# Altium PCB PCB.PcbDoc (part 1 of 2)
Units mil, origin at the board's own origin, x right, y up, seen from the top; angles counter-clockwise.
Board outline 2180 x 2315 mil, 4 copper layers (Top Layer, Layer 1, power, Bottom Layer), stack 23.756 mil thick; 49 components, 44 nets, 312 pads, 189 vias.
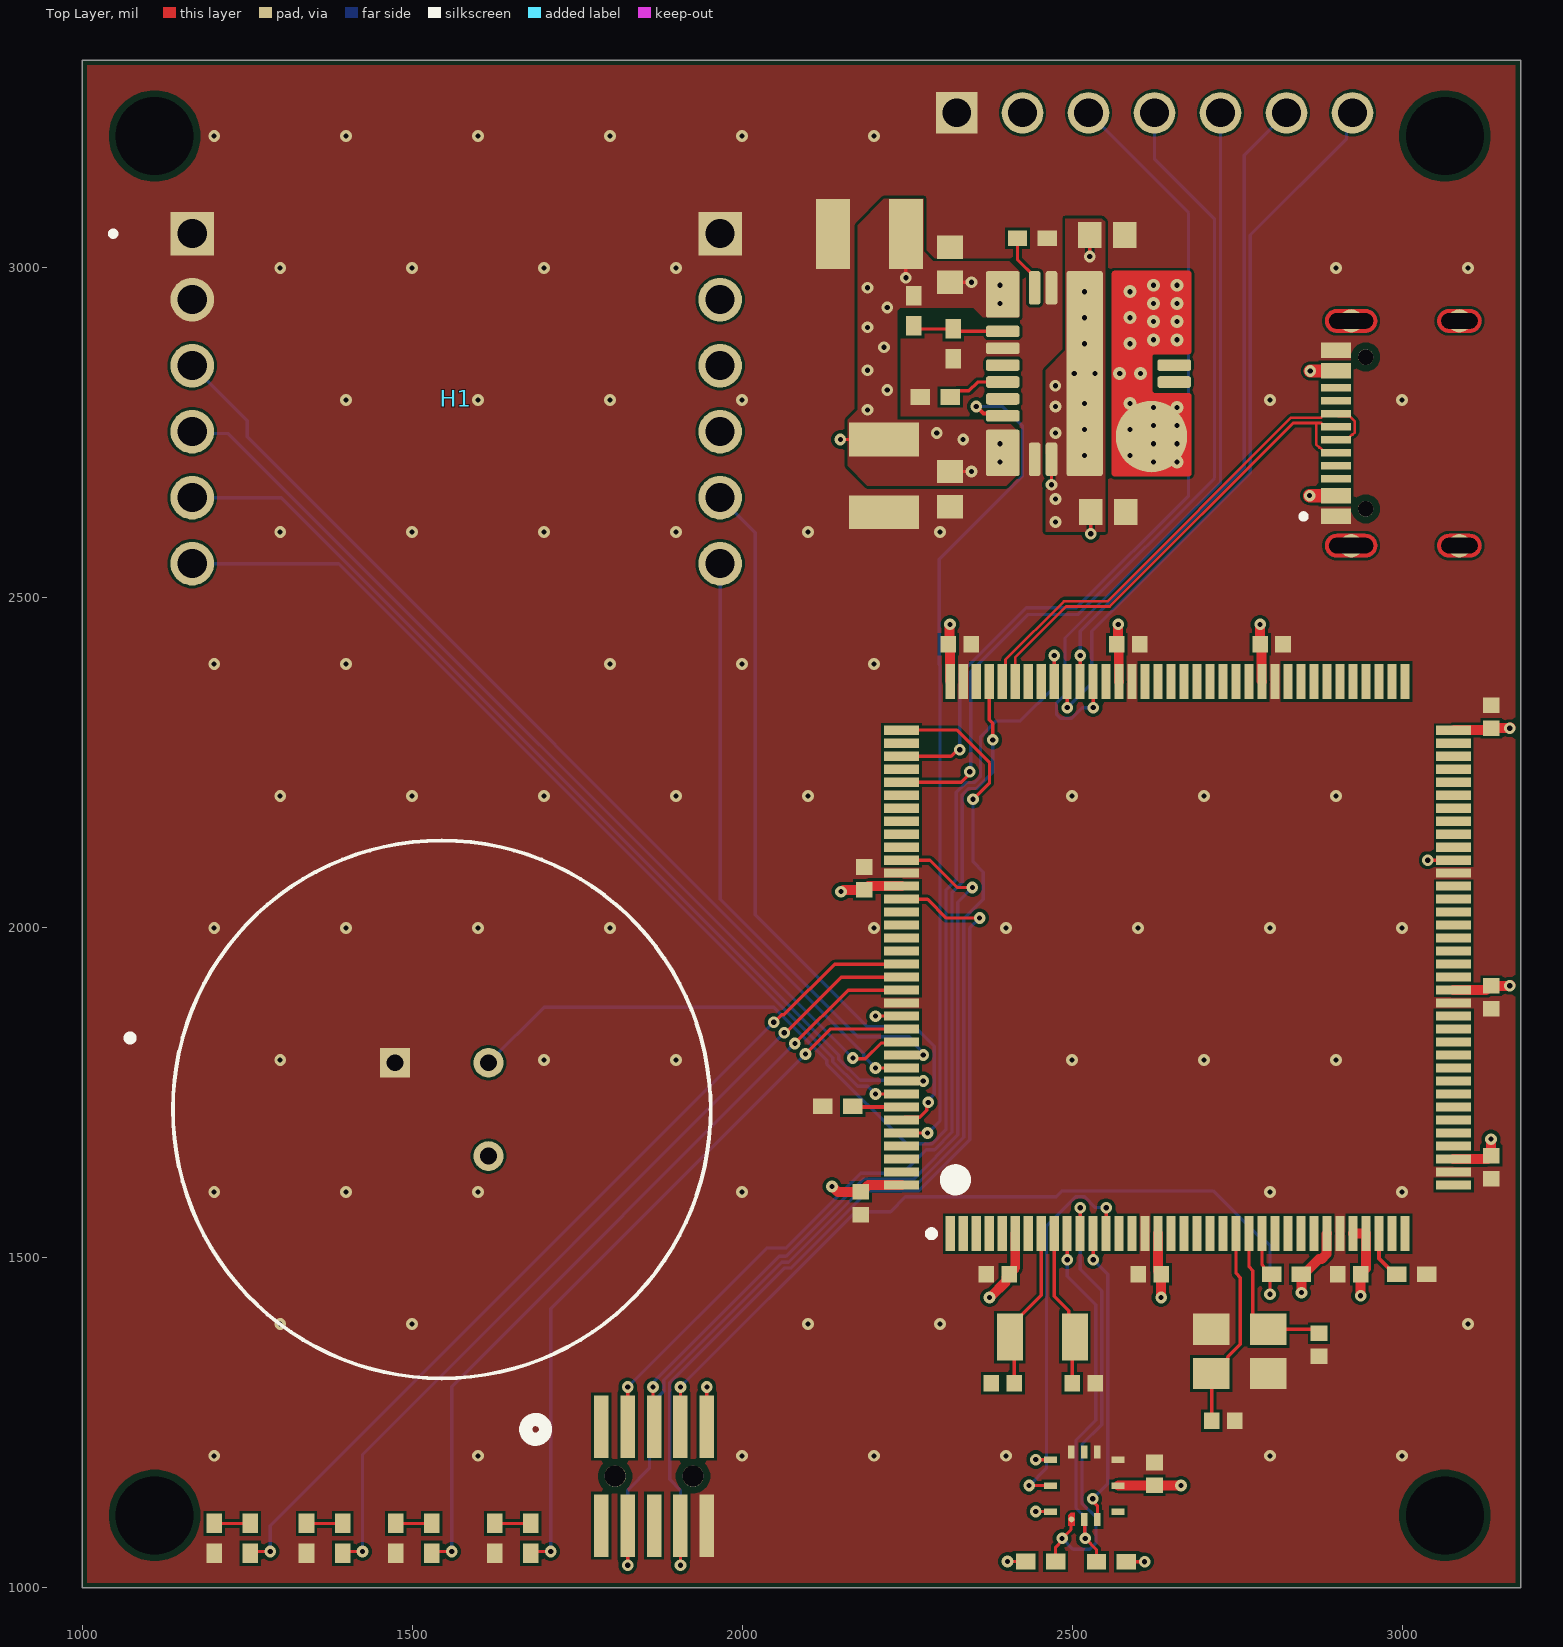
[diagram p0: Top Layer view]
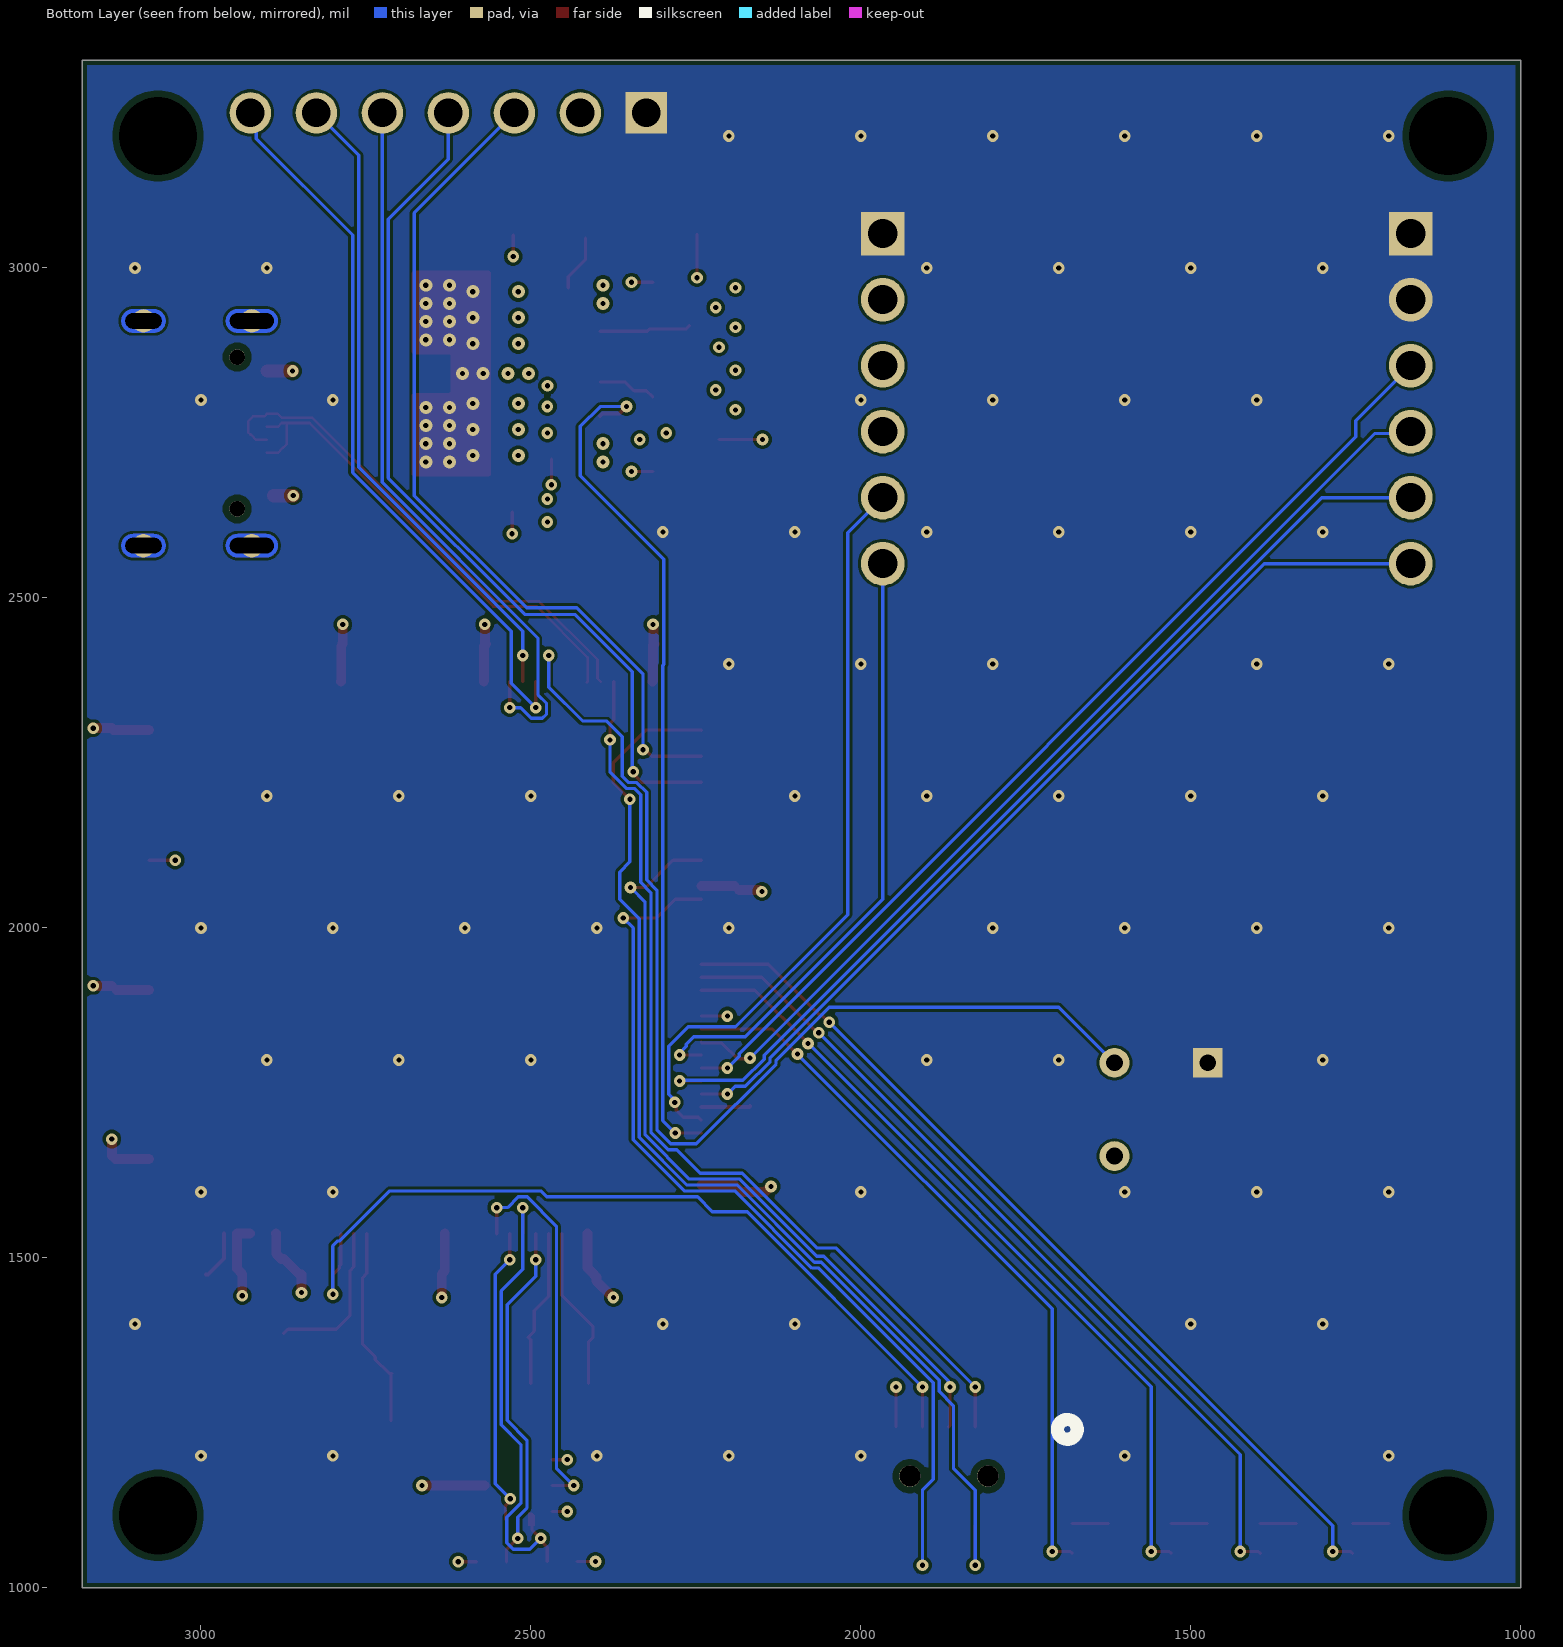
[diagram p1: Bottom Layer view, seen from below]
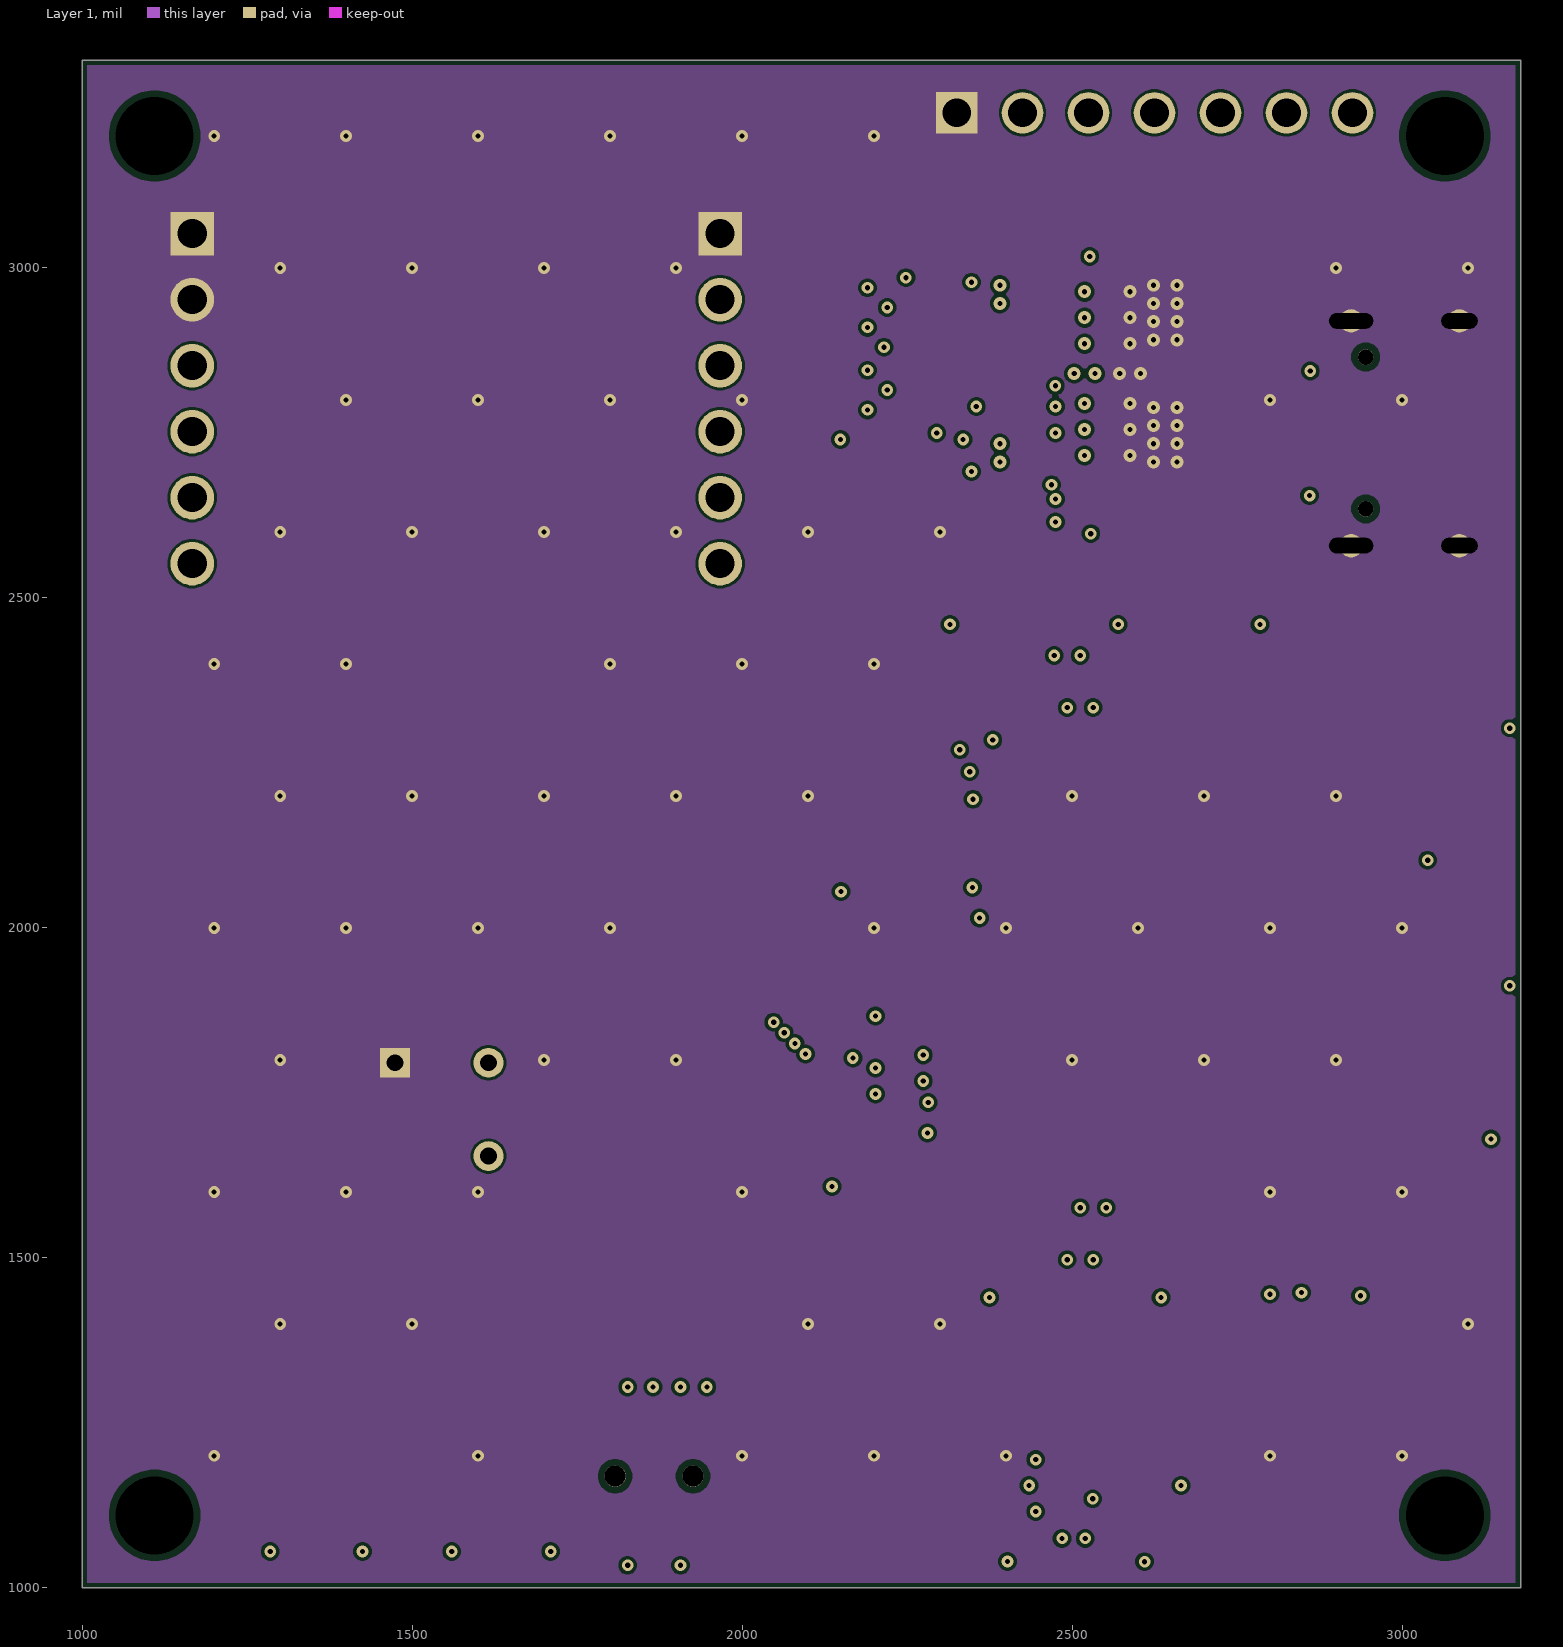
[diagram p2: Layer 1]
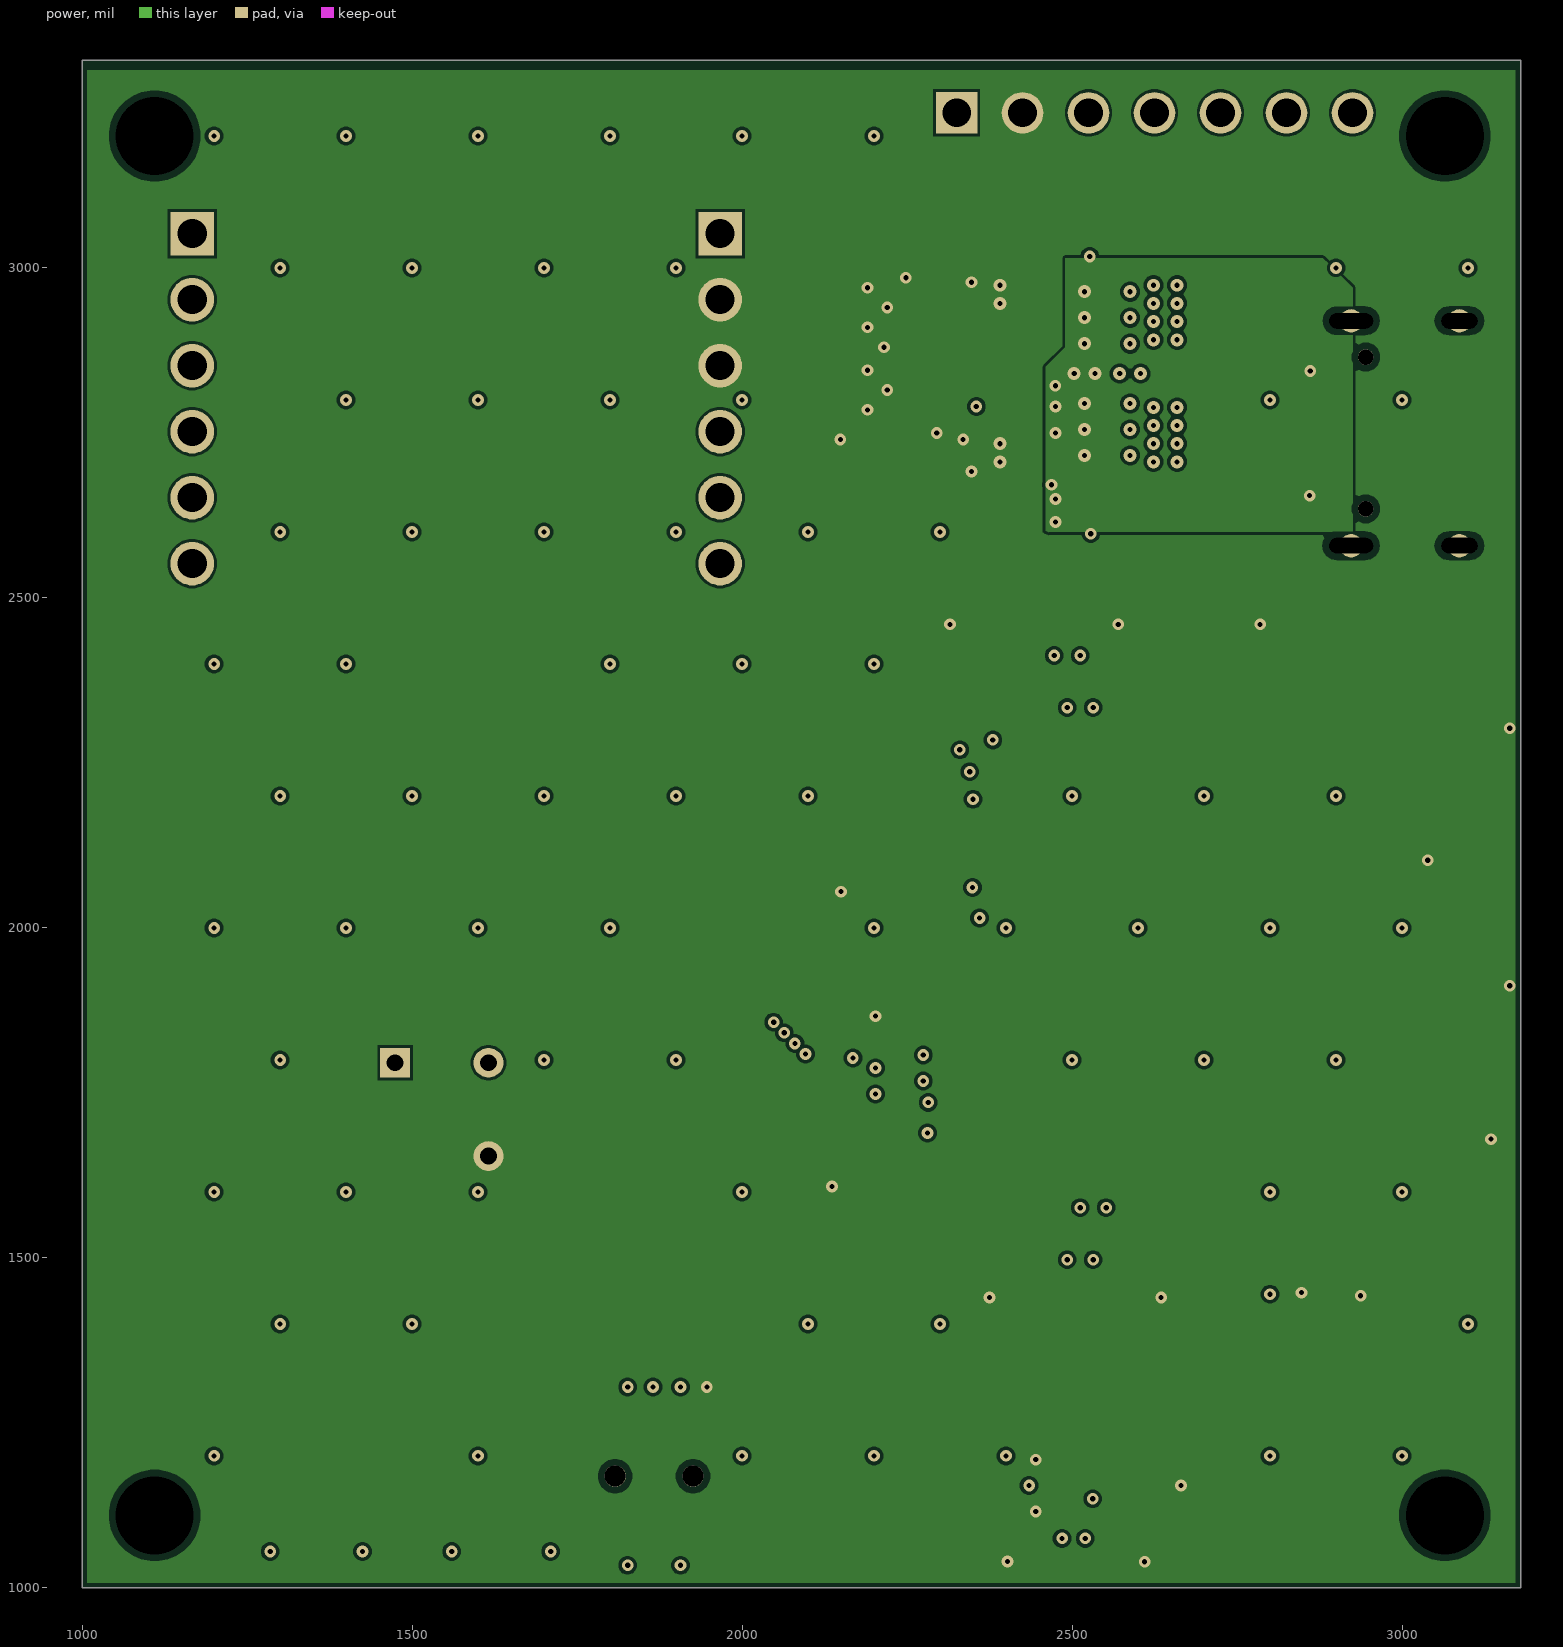
[diagram p3: power]

## Layer stack, top to bottom
Top Solder: solder mask 0.4, Solder Resist, Dk 3.5
Top Layer: signal copper 1.4
Dielectric 2: prepreg 2.8, PP-006, Dk 4.1
Layer 1: signal copper 1.378
Dielectric 1: dielectric 12.6, FR-4, Dk 4.8
power: signal copper 1.378
Dielectric 3: prepreg 2.8, PP-006, Dk 4.1
Bottom Layer: signal copper 1.4
Bottom Solder: solder mask 0.4, Solder Resist, Dk 3.5

## Board outline
1000,1000 3180,1000 3180,3315 1000,3315

## Design rules (kind name [scope] priority, off if disabled: settings)
BoardOutlineClearance [All] p1: gap=7.87 ignorepadtopadclearanceinfootprint=FALSE
Clearance [All] p1: gap=4 ignorepadtopadclearanceinfootprint=FALSE except(5: Arc-Via Track-Via SMDPad-Via THPad-Via Via-Via Via-Fill Via-Poly Via-Region Via-Text; 9.84: Arc-Hole Track-Hole SMDPad-Hole THPad-Hole Via-Hole Fill-Hole Poly-Hole Region-Hole Text-Hole)
ComponentClearance [All] p1: gap=4 collisioncheckmode=3 verticalgap=4 showdistances=TRUE
DiffPairsRouting [All] p1: maxlimit=4 minlimit=4 mostfreqgap=4 toplayer_minwidth=4 toplayer_maxwidth=71497.94 toplayer_prefwidth=4 midlayer1_minwidth=4 midlayer1_maxwidth=71497.94 midlayer1_prefwidth=4 midlayer2_minwidth=4 midlayer2_maxwidth=71497.94 midlayer2_prefwidth=4 bottomlayer_minwidth=4 bottomlayer_maxwidth=71497.94 bottomlayer_prefwidth=4 maxuncoupledlength=500
Height [All] p1: minheight=0 maxheight=71497.94 prefheight=500
HoleSize [All] p1: absolutevalues=TRUE maxlimit=248.03 minlimit=7.87 maxpercent=80.000 minpercent=20.000
HoleToHoleClearance [All] p1: gap=9.84 allowstackedmicrovias=FALSE
MinimumAnnularRing [All] p1: minimumring=3
MinimumSolderMaskSliver [All] p1: minsoldermaskwidth=0
PlaneClearance [All] p1: clearance=4
PlaneConnect PlaneConnectPowerPads [InPadClass('PowerPads')] p1: planeconnectstyle=Direct reliefexpansion=20 reliefentries=4 reliefconductorwidth=10 reliefairgap=10
PlaneConnect [All] p2: planeconnectstyle=Direct reliefexpansion=11.81 reliefentries=4 reliefconductorwidth=4 reliefairgap=4
PolygonConnect PolygonConnectPowerPads [All vs (InPadClass('PowerPads'))] p1: connectstyle=Direct reliefconductorwidth=10 reliefentries=4 polygonreliefangle="90 Angle" airgapwidth=10
PolygonConnect [All] p2: connectstyle=Direct reliefconductorwidth=4 reliefentries=4 polygonreliefangle="90 Angle" airgapwidth=4
RoutingVias [All] p1: holewidth=7.87 width=17.72 viastyle="Through Hole" minholewidth=7.87 minwidth=17.72 maxholewidth=248.03 maxwidth=257.87
SilkToSilkClearance [All] p1: silktosilkclearance=0
SilkToSolderMaskClearance [IsPad] p1: minsilkscreentomaskgap=4 clearancetoexposedcopper=TRUE
SolderMaskExpansion SolderMaskExpansion_via [IsVia] p1: expansion=2.95 istentingtop=TRUE
SolderMaskExpansion [All] p2: expansion=2.95 istentingtop=FALSE
Width [All] p1: maxlimit=71497.94 minlimit=4 preferedwidth=5
20 further rules are at their usual default settings.

## Classes and differential pairs
component class main: C1 C2 C3 C4 C5 C6 C7 C8 C9 C10 C11 C12 C13 C14 C15 C16 C17 C18 C19 C20 D2 D3 D4 H1 J1 J2 MD2 P1 R1 R2 R3 R4 R5 R6 R7 R8 R9 R10 U1 U2 Y1 Y2
differential pair USB_D: +USB_D_P -USB_D_N

## Components (designator, comment, footprint, x,y, rotation, side; value= is the part's Value field where it differs from the comment)
C1 "" "CAP 0402_1005" 2874.25,1368.34 r270 top value="9 pF"
C2 "" "CAP 0402_1005" 2387.32,1475 r180 top value="0.1 µF"
C3 "" "CAP 0402_1005" 2729.25,1253.34 r0 top value="9 pF"
C4 "" "CAP 0402_1005" 2180,1582.68 r90 top value="0.1 µF"
C5 "" "CAP 0402_1005" 2185,2075 r270 top value="0.1 µF"
C6 "" "CAP 0402_1005" 3135,1637.32 r90 top value="0.1 µF"
C7 "" "CAP 0402_1005" 2330,2430 r180 top value="0.1 µF"
C8 "" "CAP 0402_1005" 3135,2320 r270 top value="0.1 µF"
C9 "" "CAP 0402_1005" 3135,1895 r90 top value="0.1 µF"
C10 "" "CAP 0603_1608" 2555,2630 r0 top value="22 µF"
C11 "" "CAP 0603_1608" 2553.43,3050 r0 top value="22 µF"
C12 "" "CAP 0402_1005" 2395.21,1310.13 r180 top value="9 pF"
C13 "" "CAP 0402_1005" 2517.68,1310 r0 top value="9 pF"
C14 "" "CAP 0402_1005" 2802.32,2430 r180 top value="0.1 µF"
C15 "" "CAP 1210_3225 - 1MM" 2193.12,3051.34 r0 top value="47 µF"
C16 "" "CAP 0603_1608" 2315,3005 r270 top value="22 µF"
C17 "" "CAP 1210_3225 - 1MM" 2215,2685 r90 top value="47 µF"
C18 "" "CAP 0603_1608" 2315,2665 r90 top value="22 µF"
C19 "" "CAP 0402_1005" 2920,1475 r0 top value="0.1 µF"
C20 "" "CAP 0402_1005" 2617.68,1475 r0 top value="0.1 µF"
C21 "" "CAP 0402_1005" 2625,1172.68 r270 top value="0.1 µF"
C22 "" "CAP 0402_1005" 2585,2430 r180 top value="0.1 µF"
D1 "" "LED 0402_1005 BLUE" 1200,1075 r270 top value=Blue
D2 "" "LED 0402_1005 BLUE" 1340,1075 r270 top value=Blue
D3 "" "LED 0402_1005 BLUE" 1475,1075 r270 top value=Blue
D4 "" "LED 0402_1005 BLUE" 1625,1075 r270 top value=Blue
H1 "" WIZ850IO 1555,2865 r0 top
J1 "" HRO_TYPE-C-31-M-12 3087.01,2749.53 r90 top
J2 "" CONN10_M40-3200545R_HRW 1866.65,1169.31 r0 top
MD1 "" FP-EKMC1603112-MFG 1545,1725 r0 top
MD2 "" FP-MOL0024A-MFG 2525,2840 r0 top
P1 "" 61300711121 2625,3235 r0 top
R1 "" "RES 0402_1005" 3015,1475 r0 top value="10 kOhms"
R2 "" "RES 0402_1005" 2145,1730 r180 top value="10 kOhms"
R3 "" "RES 0402_1005" 2825,1475 r180 top value="10 kOhms"
R4 "" "RES 0402_1005" 2440,3045 r180 top value="48.7 kOhms"
R5 "" "RES 0402_1005" 2260,2935 r90 top value="10 kOhms"
R6 "" "RES 0402_1005" 2292.89,2804.55 r0 top value="2 kOhms"
R7 "" "RES 0402_1005" 2320,2885 r90 top value="2.21 kOhms"
R8 "" "RES 0402_1005" 2452.36,1040 r0 top value="10 kOhms"
R9 "" "RES 0402_1005" 2559.72,1039.74 r180 top value="10 kOhms"
R10 "" "RES 0402_1005" 1255,1075 r270 top value="1.5 kOhms"
R11 "" "RES 0402_1005" 1395,1075 r270 top value="1.5 kOhms"
R12 "" "RES 0402_1005" 1530,1075 r270 top value="1.5 kOhms"
R13 "" "RES 0402_1005" 1680,1075 r270 top value="1.5 kOhms"
U1 "" STM-LQFP144_V 2660,1955 r90 top
U2 "" FP-LGG12D1-MFG 2518.82,1155 r0 top
Y1 "" FP-7M-MFG 2754.25,1358.34 r180 top
Y2 "" FP-ABS07-120-MFG 2455,1380 r0 top

## Footprints (in the part's own frame and the unit in brackets; to place one, negate y for a bottom-side part, rotate by r counter-clockwise, add the part's x,y. Pads: shape width x height; smd on the part's side, far side on the other; paste and mask are expansions set on the pad)
61300711121 [mm] "Pin Header, pitch 2.54 mm, THT, Vertical, single row, 7p"
  rect 1.6x1.6 hole 1.1: 1(-7.62,0)
  round 1.6 hole 1.1: 2(-5.08,0) 3(-2.54,0) 4(0,0) 5(2.54,0) 6(5.08,0) 7(7.62,0)
  body extent -8.89,-1.27 8.89,1.27, height 8.57
"CAP 0402_1005" [mm] "Chip Capacitor, 2-Leads, Body 1.02x0.51mm, IPC Medium Density"
  rect 0.6x0.64 smd: 1(-0.44,0) 2(0.44,0)
  body extent -0.5,-0.26 0.5,0.26, height 0.52
"CAP 0603_1608" [mm] "Chip Capacitor, 2-Leads, Body 1.60x0.80mm, IPC Medium Density"
  rect 0.9x1 smd: 1(-0.675,0) 2(0.675,0)
  body extent -0.8,-0.41 0.8,0.41, height 0.82
"CAP 1210_3225 - 1MM" [mm] "Chip Capacitor, 2-Leads, Body 3.20x2.50mm, IPC Medium Density"
  rect 1.3x2.7 smd: 1(-1.4,0) 2(1.4,0)
  body extent -1.6,-1.25 1.6,1.25, height 1
CONN10_M40-3200545R_HRW [mm]
  rect 0.56x2.4 smd paste+0 mask+0: 1(-2.032,1.905) 2(-1.016,1.905) 3(0,1.905) 4(1.016,1.905) 5(2.032,1.905) 6(-2.032,-1.905) 7(-1.016,-1.905) 8(0,-1.905) 9(1.016,-1.905) 10(2.032,-1.905)
  round 0.813 hole 0.813 unplated: 11(-1.5,0) 12(1.5,0)
  silkscreen extent -4.94,1.42 -4.18,2.18, body extent 0,0 0.25,0.25, height 0.25
FP-7M-MFG [mm]
  rect 1.4x1.2 smd paste+0 mask+0: 1(-1.1,-0.85) 2(1.1,-0.85) 3(1.1,0.85) 4(-1.1,0.85)
  body extent -1.9,-1.55 1.9,1.55, height 0.25
FP-ABS07-120-MFG [mm]
  rect 1x1.8 smd paste+0 mask+0: 1(-1.25,0) 2(1.25,0)
  body extent -1.85,-1 1.85,1, height 0.25
FP-EKMC1603112-MFG [mm]
  rect 1.15x1.15 hole 0.65 paste-1000 mask+0: 1(-1.796,1.796)
  round 1.15 hole 0.65 paste-1000 mask+0: 2(1.796,1.796) 3(1.796,-1.796)
  silkscreen extent -12.12,-10.35 10.35,10.35, body extent -11.1,-10.45 11.1,10.45, height 0.25
FP-LGG12D1-MFG [mm]
  round 0.225 smd paste+0 mask+0: 1(-0.5,-1.3)
  rect 0.25x0.5 smd paste+0 mask+0: 2(0,-1.3) 3(0.5,-1.3) 7(0.5,1.3) 8(0,1.3) 9(-0.5,1.3)
  rect 0.5x0.25 smd paste+0 mask+0: 4(1.3,-1) 5(1.3,0) 6(1.3,1) 10(-1.3,1) 11(-1.3,0) 12(-1.3,-1)
  Top Layer region: -0.625,-1.55 -0.625,-1.15 -0.525,-1.05 -0.375,-1.05 -0.375,-1.55 -0.625,-1.55
  body extent -2.05,-2.05 2.05,2.05, height 0.25
FP-MOL0024A-MFG [mm]
  rrect15% 1.3x1.8 smd paste-1000 mask-1000: 1(-3.3,3.05) 8(-3.3,-3.05)
  rrect44% 1.3x0.45 smd paste-1000 mask-1000: 2(-3.3,1.625) 3(-3.3,0.975) 4(-3.3,0.325) 5(-3.3,-0.325) 6(-3.3,-0.975) 7(-3.3,-1.625) 16(3.3,-0.325) 17(3.3,0.325)
  rrect44% 0.45x1.3 smd paste-1000 mask-1000: 9(-2.075,-3.3) 10(-1.425,-3.3) 23(-1.425,3.3) 24(-2.075,3.3)
  rrect14% 1.4x7.9 smd paste-1000 mask-1000: 11-22(-0.15,0)
  round 2.745 smd paste-1000 mask-1000: 12-13-14-15-18-19-20-21(2.425,-2.425)
  Top Layer region: 0.9,3.85 0.908,3.888 0.929,3.921 0.962,3.942 1,3.95 1,3.95 3.85,3.95 3.9,3.937 3.937,3.9 3.95,3.85 3.95,3.85 3.95,0.85 3.942,0.812 3.921,0.779 3.888,0.758 3.85,0.75 3.85,0.75 2.55,0.75 2.5,0.737 2.463,0.7 2.45,0.65 2.45,0.65 2.45,-0.65 2.463,-0.7 2.5,-0.737 2.55,-0.75 2.55,-0.75 3.85,-0.75 3.9,-0.763 3.937,-0.8 3.95,-0.85 3.95,-0.85 3.95,-3.85 3.937,-3.9 3.9,-3.937 3.85,-3.95 3.85,-3.95 1,-3.95 0.95,-3.937 0.913,-3.9 0.9,-3.85 0.9,-3.85
  body extent -4.05,-4.05 4.05,4.05, height 0.25
HRO_TYPE-C-31-M-12 [mm]
  round 0.9 hole 0.6 slot 1.7 at 90 deg mask+0: 321(-4.325,4.17) S2(4.325,4.17)
  rect 0.6x1.14 smd mask+0.05: A1/B12(-3.2,4.75) A4/B9(-2.4,4.75) B1/A12(3.2,4.75) B4/A9(2.4,4.75)
  rect 0.3x1.14 smd mask+0.05: A5(-1.25,4.75) A6(-0.25,4.75) A7(0.25,4.75) A8(1.25,4.75) B5(1.75,4.75) B6(0.75,4.75) B7(-0.75,4.75) B8(-1.75,4.75)
  round 0.9 hole 0.6 slot 1.4 at 90 deg mask+0: S3(-4.325,0) S4(4.325,0)
  round 0.6 hole 0.6 unplated: ""(-2.909,3.607) ""(2.933,3.607)
  Top Layer region: -4.301,5.169 -4.278,5.168 -4.255,5.164 -4.231,5.16 -4.209,5.155 -4.186,5.148 -4.164,5.14 -4.142,5.131 -4.121,5.121 -4.1,5.11 -4.08,5.097 -4.06,5.084 -4.042,5.07 -4.024,5.054 -4.007,5.038 -3.991,5.021 -3.975,5.003 -3.961,4.985 -3.948,4.965 -3.935,4.945 -3.924,4.924 -3.914,4.903 -3.905,4.881 -3.897,4.859 -3.89,4.836 -3.885,4.814 -3.881,4.79 -3.877,4.767 -3.876,4.744 -3.875,4.72 -3.875,3.62 -3.876,3.596 -3.877,3.573 -3.881,3.55 -3.885,3.526 -3.89,3.504 -3.897,3.481 -3.905,3.459 -3.914,3.437 -3.924,3.416 -3.935,3.395 -3.948,3.375 -3.961,3.355 -3.975,3.337 -3.991,3.319 -4.007,3.302 -4.024,3.286 -4.042,3.27 -4.06,3.256 -4.08,3.243 -4.1,3.23 -4.121,3.219 -4.142,3.209 -4.164,3.2 -4.186,3.192 -4.209,3.185 -4.231,3.18 -4.255,3.176 -4.278,3.172 -4.301,3.171 -4.325,3.17 -4.349,3.171 -4.372,3.172 -4.395,3.176 -4.419,3.18 -4.441,3.185 -4.464,3.192 -4.486,3.2 -4.508,3.209 -4.529,3.219 -4.55,3.23 -4.57,3.243 -4.59,3.256 -4.608,3.27 -4.626,3.286 -4.643,3.302 -4.659,3.319 -4.675,3.337 -4.689,3.355 -4.702,3.375 -4.715,3.395 -4.726,3.416 -4.736,3.437 -4.745,3.459 -4.753,3.481 -4.76,3.504 -4.765,3.526 -4.769,3.55 -4.773,3.573 -4.774,3.596 -4.775,3.62 -4.775,4.72 -4.774,4.744 -4.773,4.767 -4.769,4.79 -4.765,4.814 -4.76,4.836 -4.753,4.859 -4.745,4.881 -4.736,4.903 -4.726,4.924 -4.715,4.945 -4.702,4.965 -4.689,4.985 -4.675,5.003 -4.659,5.021 -4.643,5.038 -4.626,5.054 -4.608,5.07 -4.59,5.084 -4.57,5.097 -4.55,5.11 -4.529,5.121 -4.508,5.131 -4.486,5.14 -4.464,5.148 -4.441,5.155 -4.419,5.16 -4.395,5.164 -4.372,5.168 -4.349,5.169 -4.325,5.17
  Top Layer region: 4.349,5.169 4.372,5.168 4.395,5.164 4.419,5.16 4.441,5.155 4.464,5.148 4.486,5.14 4.508,5.131 4.529,5.121 4.55,5.11 4.57,5.097 4.59,5.084 4.608,5.07 4.626,5.054 4.643,5.038 4.659,5.021 4.675,5.003 4.689,4.985 4.702,4.965 4.715,4.945 4.726,4.924 4.736,4.903 4.745,4.881 4.753,4.859 4.76,4.836 4.765,4.814 4.769,4.79 4.773,4.767 4.774,4.744 4.775,4.72 4.775,3.62 4.774,3.596 4.773,3.573 4.769,3.55 4.765,3.526 4.76,3.504 4.753,3.481 4.745,3.459 4.736,3.437 4.726,3.416 4.715,3.395 4.702,3.375 4.689,3.355 4.675,3.337 4.659,3.319 4.643,3.302 4.626,3.286 4.608,3.27 4.59,3.256 4.57,3.243 4.55,3.23 4.529,3.219 4.508,3.209 4.486,3.2 4.464,3.192 4.441,3.185 4.419,3.18 4.395,3.176 4.372,3.172 4.349,3.171 4.325,3.17 4.301,3.171 4.278,3.172 4.255,3.176 4.231,3.18 4.209,3.185 4.186,3.192 4.164,3.2 4.142,3.209 4.121,3.219 4.1,3.23 4.08,3.243 4.06,3.256 4.042,3.27 4.024,3.286 4.007,3.302 3.991,3.319 3.975,3.337 3.961,3.355 3.948,3.375 3.935,3.395 3.924,3.416 3.914,3.437 3.905,3.459 3.897,3.481 3.89,3.504 3.885,3.526 3.881,3.55 3.877,3.573 3.876,3.596 3.875,3.62 3.875,4.72 3.876,4.744 3.877,4.767 3.881,4.79 3.885,4.814 3.89,4.836 3.897,4.859 3.905,4.881 3.914,4.903 3.924,4.924 3.935,4.945 3.948,4.965 3.961,4.985 3.975,5.003 3.991,5.021 4.007,5.038 4.024,5.054 4.042,5.07 4.06,5.084 4.08,5.097 4.1,5.11 4.121,5.121 4.142,5.131 4.164,5.14 4.186,5.148 4.209,5.155 4.231,5.16 4.255,5.164 4.278,5.168 4.301,5.169 4.325,5.17
  Top Layer region: -4.301,0.849 -4.278,0.848 -4.255,0.844 -4.231,0.84 -4.209,0.835 -4.186,0.828 -4.164,0.82 -4.142,0.811 -4.121,0.801 -4.1,0.79 -4.08,0.777 -4.06,0.764 -4.042,0.75 -4.024,0.734 -4.007,0.718 -3.991,0.701 -3.975,0.683 -3.961,0.665 -3.948,0.645 -3.935,0.625 -3.924,0.604 -3.914,0.583 -3.905,0.561 -3.897,0.539 -3.89,0.516 -3.885,0.494 -3.881,0.47 -3.877,0.447 -3.876,0.424 -3.875,0.4 -3.875,-0.4 -3.876,-0.424 -3.877,-0.447 -3.881,-0.47 -3.885,-0.494 -3.89,-0.516 -3.897,-0.539 -3.905,-0.561 -3.914,-0.583 -3.924,-0.604 -3.935,-0.625 -3.948,-0.645 -3.961,-0.665 -3.975,-0.683 -3.991,-0.701 -4.007,-0.718 -4.024,-0.734 -4.042,-0.75 -4.06,-0.764 -4.08,-0.777 -4.1,-0.79 -4.121,-0.801 -4.142,-0.811 -4.164,-0.82 -4.186,-0.828 -4.209,-0.835 -4.231,-0.84 -4.255,-0.844 -4.278,-0.848 -4.301,-0.849 -4.325,-0.85 -4.349,-0.849 -4.372,-0.848 -4.395,-0.844 -4.419,-0.84 -4.441,-0.835 -4.464,-0.828 -4.486,-0.82 -4.508,-0.811 -4.529,-0.801 -4.55,-0.79 -4.57,-0.777 -4.59,-0.764 -4.608,-0.75 -4.626,-0.734 -4.643,-0.718 -4.659,-0.701 -4.675,-0.683 -4.689,-0.665 -4.702,-0.645 -4.715,-0.625 -4.726,-0.604 -4.736,-0.583 -4.745,-0.561 -4.753,-0.539 -4.76,-0.516 -4.765,-0.494 -4.769,-0.47 -4.773,-0.447 -4.774,-0.424 -4.775,-0.4 -4.775,0.4 -4.774,0.424 -4.773,0.447 -4.769,0.47 -4.765,0.494 -4.76,0.516 -4.753,0.539 -4.745,0.561 -4.736,0.583 -4.726,0.604 -4.715,0.625 -4.702,0.645 -4.689,0.665 -4.675,0.683 -4.659,0.701 -4.643,0.718 -4.626,0.734 -4.608,0.75 -4.59,0.764 -4.57,0.777 -4.55,0.79 -4.529,0.801 -4.508,0.811 -4.486,0.82 -4.464,0.828 -4.441,0.835 -4.419,0.84 -4.395,0.844 -4.372,0.848 -4.349,0.849 -4.325,0.85
  Top Layer region: 4.349,0.849 4.372,0.848 4.395,0.844 4.419,0.84 4.441,0.835 4.464,0.828 4.486,0.82 4.508,0.811 4.529,0.801 4.55,0.79 4.57,0.777 4.59,0.764 4.608,0.75 4.626,0.734 4.643,0.718 4.659,0.701 4.675,0.683 4.689,0.665 4.702,0.645 4.715,0.625 4.726,0.604 4.736,0.583 4.745,0.561 4.753,0.539 4.76,0.516 4.765,0.494 4.769,0.47 4.773,0.447 4.774,0.424 4.775,0.4 4.775,-0.4 4.774,-0.424 4.773,-0.447 4.769,-0.47 4.765,-0.494 4.76,-0.516 4.753,-0.539 4.745,-0.561 4.736,-0.583 4.726,-0.604 4.715,-0.625 4.702,-0.645 4.689,-0.665 4.675,-0.683 4.659,-0.701 4.643,-0.718 4.626,-0.734 4.608,-0.75 4.59,-0.764 4.57,-0.777 4.55,-0.79 4.529,-0.801 4.508,-0.811 4.486,-0.82 4.464,-0.828 4.441,-0.835 4.419,-0.84 4.395,-0.844 4.372,-0.848 4.349,-0.849 4.325,-0.85 4.301,-0.849 4.278,-0.848 4.255,-0.844 4.231,-0.84 4.209,-0.835 4.186,-0.828 4.164,-0.82 4.142,-0.811 4.121,-0.801 4.1,-0.79 4.08,-0.777 4.06,-0.764 4.042,-0.75 4.024,-0.734 4.007,-0.718 3.991,-0.701 3.975,-0.683 3.961,-0.665 3.948,-0.645 3.935,-0.625 3.924,-0.604 3.914,-0.583 3.905,-0.561 3.897,-0.539 3.89,-0.516 3.885,-0.494 3.881,-0.47 3.877,-0.447 3.876,-0.424 3.875,-0.4 3.875,0.4 3.876,0.424 3.877,0.447 3.881,0.47 3.885,0.494 3.89,0.516 3.897,0.539 3.905,0.561 3.914,0.583 3.924,0.604 3.935,0.625 3.948,0.645 3.961,0.665 3.975,0.683 3.991,0.701 4.007,0.718 4.024,0.734 4.042,0.75 4.06,0.764 4.08,0.777 4.1,0.79 4.121,0.801 4.142,0.811 4.164,0.82 4.186,0.828 4.209,0.835 4.231,0.84 4.255,0.844 4.278,0.848 4.301,0.849 4.325,0.85
  Bottom Layer region: -4.301,5.169 -4.278,5.168 -4.255,5.164 -4.231,5.16 -4.209,5.155 -4.186,5.148 -4.164,5.14 -4.142,5.131 -4.121,5.121 -4.1,5.11 -4.08,5.097 -4.06,5.084 -4.042,5.07 -4.024,5.054 -4.007,5.038 -3.991,5.021 -3.975,5.003 -3.961,4.985 -3.948,4.965 -3.935,4.945 -3.924,4.924 -3.914,4.903 -3.905,4.881 -3.897,4.859 -3.89,4.836 -3.885,4.814 -3.881,4.79 -3.877,4.767 -3.876,4.744 -3.875,4.72 -3.875,3.62 -3.876,3.596 -3.877,3.573 -3.881,3.55 -3.885,3.526 -3.89,3.504 -3.897,3.481 -3.905,3.459 -3.914,3.437 -3.924,3.416 -3.935,3.395 -3.948,3.375 -3.961,3.355 -3.975,3.337 -3.991,3.319 -4.007,3.302 -4.024,3.286 -4.042,3.27 -4.06,3.256 -4.08,3.243 -4.1,3.23 -4.121,3.219 -4.142,3.209 -4.164,3.2 -4.186,3.192 -4.209,3.185 -4.231,3.18 -4.255,3.176 -4.278,3.172 -4.301,3.171 -4.325,3.17 -4.349,3.171 -4.372,3.172 -4.395,3.176 -4.419,3.18 -4.441,3.185 -4.464,3.192 -4.486,3.2 -4.508,3.209 -4.529,3.219 -4.55,3.23 -4.57,3.243 -4.59,3.256 -4.608,3.27 -4.626,3.286 -4.643,3.302 -4.659,3.319 -4.675,3.337 -4.689,3.355 -4.702,3.375 -4.715,3.395 -4.726,3.416 -4.736,3.437 -4.745,3.459 -4.753,3.481 -4.76,3.504 -4.765,3.526 -4.769,3.55 -4.773,3.573 -4.774,3.596 -4.775,3.62 -4.775,4.72 -4.774,4.744 -4.773,4.767 -4.769,4.79 -4.765,4.814 -4.76,4.836 -4.753,4.859 -4.745,4.881 -4.736,4.903 -4.726,4.924 -4.715,4.945 -4.702,4.965 -4.689,4.985 -4.675,5.003 -4.659,5.021 -4.643,5.038 -4.626,5.054 -4.608,5.07 -4.59,5.084 -4.57,5.097 -4.55,5.11 -4.529,5.121 -4.508,5.131 -4.486,5.14 -4.464,5.148 -4.441,5.155 -4.419,5.16 -4.395,5.164 -4.372,5.168 -4.349,5.169 -4.325,5.17
  Bottom Layer region: 4.349,5.169 4.372,5.168 4.395,5.164 4.419,5.16 4.441,5.155 4.464,5.148 4.486,5.14 4.508,5.131 4.529,5.121 4.55,5.11 4.57,5.097 4.59,5.084 4.608,5.07 4.626,5.054 4.643,5.038 4.659,5.021 4.675,5.003 4.689,4.985 4.702,4.965 4.715,4.945 4.726,4.924 4.736,4.903 4.745,4.881 4.753,4.859 4.76,4.836 4.765,4.814 4.769,4.79 4.773,4.767 4.774,4.744 4.775,4.72 4.775,3.62 4.774,3.596 4.773,3.573 4.769,3.55 4.765,3.526 4.76,3.504 4.753,3.481 4.745,3.459 4.736,3.437 4.726,3.416 4.715,3.395 4.702,3.375 4.689,3.355 4.675,3.337 4.659,3.319 4.643,3.302 4.626,3.286 4.608,3.27 4.59,3.256 4.57,3.243 4.55,3.23 4.529,3.219 4.508,3.209 4.486,3.2 4.464,3.192 4.441,3.185 4.419,3.18 4.395,3.176 4.372,3.172 4.349,3.171 4.325,3.17 4.301,3.171 4.278,3.172 4.255,3.176 4.231,3.18 4.209,3.185 4.186,3.192 4.164,3.2 4.142,3.209 4.121,3.219 4.1,3.23 4.08,3.243 4.06,3.256 4.042,3.27 4.024,3.286 4.007,3.302 3.991,3.319 3.975,3.337 3.961,3.355 3.948,3.375 3.935,3.395 3.924,3.416 3.914,3.437 3.905,3.459 3.897,3.481 3.89,3.504 3.885,3.526 3.881,3.55 3.877,3.573 3.876,3.596 3.875,3.62 3.875,4.72 3.876,4.744 3.877,4.767 3.881,4.79 3.885,4.814 3.89,4.836 3.897,4.859 3.905,4.881 3.914,4.903 3.924,4.924 3.935,4.945 3.948,4.965 3.961,4.985 3.975,5.003 3.991,5.021 4.007,5.038 4.024,5.054 4.042,5.07 4.06,5.084 4.08,5.097 4.1,5.11 4.121,5.121 4.142,5.131 4.164,5.14 4.186,5.148 4.209,5.155 4.231,5.16 4.255,5.164 4.278,5.168 4.301,5.169 4.325,5.17
  Bottom Layer region: -4.301,0.849 -4.278,0.848 -4.255,0.844 -4.231,0.84 -4.209,0.835 -4.186,0.828 -4.164,0.82 -4.142,0.811 -4.121,0.801 -4.1,0.79 -4.08,0.777 -4.06,0.764 -4.042,0.75 -4.024,0.734 -4.007,0.718 -3.991,0.701 -3.975,0.683 -3.961,0.665 -3.948,0.645 -3.935,0.625 -3.924,0.604 -3.914,0.583 -3.905,0.561 -3.897,0.539 -3.89,0.516 -3.885,0.494 -3.881,0.47 -3.877,0.447 -3.876,0.424 -3.875,0.4 -3.875,-0.4 -3.876,-0.424 -3.877,-0.447 -3.881,-0.47 -3.885,-0.494 -3.89,-0.516 -3.897,-0.539 -3.905,-0.561 -3.914,-0.583 -3.924,-0.604 -3.935,-0.625 -3.948,-0.645 -3.961,-0.665 -3.975,-0.683 -3.991,-0.701 -4.007,-0.718 -4.024,-0.734 -4.042,-0.75 -4.06,-0.764 -4.08,-0.777 -4.1,-0.79 -4.121,-0.801 -4.142,-0.811 -4.164,-0.82 -4.186,-0.828 -4.209,-0.835 -4.231,-0.84 -4.255,-0.844 -4.278,-0.848 -4.301,-0.849 -4.325,-0.85 -4.349,-0.849 -4.372,-0.848 -4.395,-0.844 -4.419,-0.84 -4.441,-0.835 -4.464,-0.828 -4.486,-0.82 -4.508,-0.811 -4.529,-0.801 -4.55,-0.79 -4.57,-0.777 -4.59,-0.764 -4.608,-0.75 -4.626,-0.734 -4.643,-0.718 -4.659,-0.701 -4.675,-0.683 -4.689,-0.665 -4.702,-0.645 -4.715,-0.625 -4.726,-0.604 -4.736,-0.583 -4.745,-0.561 -4.753,-0.539 -4.76,-0.516 -4.765,-0.494 -4.769,-0.47 -4.773,-0.447 -4.774,-0.424 -4.775,-0.4 -4.775,0.4 -4.774,0.424 -4.773,0.447 -4.769,0.47 -4.765,0.494 -4.76,0.516 -4.753,0.539 -4.745,0.561 -4.736,0.583 -4.726,0.604 -4.715,0.625 -4.702,0.645 -4.689,0.665 -4.675,0.683 -4.659,0.701 -4.643,0.718 -4.626,0.734 -4.608,0.75 -4.59,0.764 -4.57,0.777 -4.55,0.79 -4.529,0.801 -4.508,0.811 -4.486,0.82 -4.464,0.828 -4.441,0.835 -4.419,0.84 -4.395,0.844 -4.372,0.848 -4.349,0.849 -4.325,0.85
  Bottom Layer region: 4.349,0.849 4.372,0.848 4.395,0.844 4.419,0.84 4.441,0.835 4.464,0.828 4.486,0.82 4.508,0.811 4.529,0.801 4.55,0.79 4.57,0.777 4.59,0.764 4.608,0.75 4.626,0.734 4.643,0.718 4.659,0.701 4.675,0.683 4.689,0.665 4.702,0.645 4.715,0.625 4.726,0.604 4.736,0.583 4.745,0.561 4.753,0.539 4.76,0.516 4.765,0.494 4.769,0.47 4.773,0.447 4.774,0.424 4.775,0.4 4.775,-0.4 4.774,-0.424 4.773,-0.447 4.769,-0.47 4.765,-0.494 4.76,-0.516 4.753,-0.539 4.745,-0.561 4.736,-0.583 4.726,-0.604 4.715,-0.625 4.702,-0.645 4.689,-0.665 4.675,-0.683 4.659,-0.701 4.643,-0.718 4.626,-0.734 4.608,-0.75 4.59,-0.764 4.57,-0.777 4.55,-0.79 4.529,-0.801 4.508,-0.811 4.486,-0.82 4.464,-0.828 4.441,-0.835 4.419,-0.84 4.395,-0.844 4.372,-0.848 4.349,-0.849 4.325,-0.85 4.301,-0.849 4.278,-0.848 4.255,-0.844 4.231,-0.84 4.209,-0.835 4.186,-0.828 4.164,-0.82 4.142,-0.811 4.121,-0.801 4.1,-0.79 4.08,-0.777 4.06,-0.764 4.042,-0.75 4.024,-0.734 4.007,-0.718 3.991,-0.701 3.975,-0.683 3.961,-0.665 3.948,-0.645 3.935,-0.625 3.924,-0.604 3.914,-0.583 3.905,-0.561 3.897,-0.539 3.89,-0.516 3.885,-0.494 3.881,-0.47 3.877,-0.447 3.876,-0.424 3.875,-0.4 3.875,0.4 3.876,0.424 3.877,0.447 3.881,0.47 3.885,0.494 3.89,0.516 3.897,0.539 3.905,0.561 3.914,0.583 3.924,0.604 3.935,0.625 3.948,0.645 3.961,0.665 3.975,0.683 3.991,0.701 4.007,0.718 4.024,0.734 4.042,0.75 4.06,0.764 4.08,0.777 4.1,0.79 4.121,0.801 4.142,0.811 4.164,0.82 4.186,0.828 4.209,0.835 4.231,0.84 4.255,0.844 4.278,0.848 4.301,0.849 4.325,0.85
  silkscreen extent -3.3,5.9 -3.1,6.1, body extent -4.47,-2.6 4.47,5.31, height 3.31
"LED 0402_1005 BLUE" [mm] "Chip Diode, 2-Leads, Body 1.00x0.50mm, IPC Medium Density"
  rect 0.75x0.6 smd: 1(-0.575,0) 2(0.575,0)
  body extent -0.5,-0.25 0.5,0.25, height 0.21
"RES 0402_1005" [mm] "Chip Resistor, 2-Leads, Body 1.0x0.5mm, IPC Medium Density"
  rect 0.75x0.6 smd: 1(-0.575,0) 2(0.575,0)
  body extent -0.5,-0.25 0.5,0.25, height 0.35
STM-LQFP144_V [mm] "Thin QFP, 144-Leads, Body 20x20mm, Pitch 0.5mm, ST Recommended"
  rect 1.35x0.35 smd: 1(-10.625,8.75) 2(-10.625,8.25) 3(-10.625,7.75) 4(-10.625,7.25) 5(-10.625,6.75) 6(-10.625,6.25) 7(-10.625,5.75) 8(-10.625,5.25) 9(-10.625,4.75) 10(-10.625,4.25) 11(-10.625,3.75) 12(-10.625,3.25) 13(-10.625,2.75) 14(-10.625,2.25) 15(-10.625,1.75) 16(-10.625,1.25) 17(-10.625,0.75) 18(-10.625,0.25) 19(-10.625,-0.25) 20(-10.625,-0.75) 21(-10.625,-1.25) 22(-10.625,-1.75) 23(-10.625,-2.25) 24(-10.625,-2.75) 25(-10.625,-3.25) 26(-10.625,-3.75) 27(-10.625,-4.25) 28(-10.625,-4.75) 29(-10.625,-5.25) 30(-10.625,-5.75) 31(-10.625,-6.25) 32(-10.625,-6.75) 33(-10.625,-7.25) 34(-10.625,-7.75) 35(-10.625,-8.25) 36(-10.625,-8.75) 73(10.625,-8.75) 74(10.625,-8.25) 75(10.625,-7.75) 76(10.625,-7.25) 77(10.625,-6.75) 78(10.625,-6.25) 79(10.625,-5.75) 80(10.625,-5.25) 81(10.625,-4.75) 82(10.625,-4.25) 83(10.625,-3.75) 84(10.625,-3.25) 85(10.625,-2.75) 86(10.625,-2.25) 87(10.625,-1.75) 88(10.625,-1.25) 89(10.625,-0.75) 90(10.625,-0.25) 91(10.625,0.25) 92(10.625,0.75) 93(10.625,1.25) 94(10.625,1.75) 95(10.625,2.25) 96(10.625,2.75) 97(10.625,3.25) 98(10.625,3.75) 99(10.625,4.25) 100(10.625,4.75) 101(10.625,5.25) 102(10.625,5.75) 103(10.625,6.25) 104(10.625,6.75) 105(10.625,7.25) 106(10.625,7.75) 107(10.625,8.25) 108(10.625,8.75)
  rect 0.35x1.35 smd: 37(-8.75,-10.625) 38(-8.25,-10.625) 39(-7.75,-10.625) 40(-7.25,-10.625) 41(-6.75,-10.625) 42(-6.25,-10.625) 43(-5.75,-10.625) 44(-5.25,-10.625) 45(-4.75,-10.625) 46(-4.25,-10.625) 47(-3.75,-10.625) 48(-3.25,-10.625) 49(-2.75,-10.625) 50(-2.25,-10.625) 51(-1.75,-10.625) 52(-1.25,-10.625) 53(-0.75,-10.625) 54(-0.25,-10.625) 55(0.25,-10.625) 56(0.75,-10.625) 57(1.25,-10.625) 58(1.75,-10.625) 59(2.25,-10.625) 60(2.75,-10.625) 61(3.25,-10.625) 62(3.75,-10.625) 63(4.25,-10.625) 64(4.75,-10.625) 65(5.25,-10.625) 66(5.75,-10.625) 67(6.25,-10.625) 68(6.75,-10.625) 69(7.25,-10.625) 70(7.75,-10.625) 71(8.25,-10.625) 72(8.75,-10.625) 109(8.75,10.625) 110(8.25,10.625) 111(7.75,10.625) 112(7.25,10.625) 113(6.75,10.625) 114(6.25,10.625) 115(5.75,10.625) 116(5.25,10.625) 117(4.75,10.625) 118(4.25,10.625) 119(3.75,10.625) 120(3.25,10.625) 121(2.75,10.625) 122(2.25,10.625) 123(1.75,10.625) 124(1.25,10.625) 125(0.75,10.625) 126(0.25,10.625) 127(-0.25,10.625) 128(-0.75,10.625) 129(-1.25,10.625) 130(-1.75,10.625) 131(-2.25,10.625) 132(-2.75,10.625) 133(-3.25,10.625) 134(-3.75,10.625) 135(-4.25,10.625) 136(-4.75,10.625) 137(-5.25,10.625) 138(-5.75,10.625) 139(-6.25,10.625) 140(-6.75,10.625) 141(-7.25,10.625) 142(-7.75,10.625) 143(-8.25,10.625) 144(-8.75,10.625)
  silkscreen extent -10.75,8.25 -8.25,9.6, body extent -10,-10 10,10, height 1.6
WIZ850IO [mm]
  rect 1.68x1.68 hole 1.12: 1(-9.86,4.75) 7(10.46,4.75)
  round 1.68 hole 1.12: 2(-9.86,2.21) 3(-9.86,-0.33) 4(-9.86,-2.87) 5(-9.86,-5.41) 6(-9.86,-7.95) 8(10.46,2.21) 9(10.46,-0.33) 10(10.46,-2.87) 11(10.46,-5.41) 12(10.46,-7.95)
  silkscreen extent -13,4.65 -12.8,4.85

## Part data
C1 C3 C12 C13: library part 0402N9R0D500CT, "CAP CER 9PF 50V C0G/NP0 0402", Capacitance="9 pF", Device Package="0402 (1005 Metric)", Manufacturer="Walsin Technology Corporation", Operating Temperature="-55°C ~ 125°C", Supplier Part Number 1=1292-1364-1-ND, Temperature Coefficient="C0G, NP0", Tolerance=±0.5pF, Voltage - Rated=50V, Applications="General Purpose", ComponentLink1Description=Datasheet, ComponentLink1URL=http://www.passivecomponent.com/wp-content/uploads/2018/10/MLCC.pdf, ComponentLink2Description="DigiKey Link", ComponentLink2URL=https://www.digikey.com/en/products/detail/walsin-technology-corporation/0402N9R0D500CT/9354861, LastUpdated="19/9/2022 12:57:29 pm", Lifecycle Status=Active, Minimum Order=1, Mounting Type="Surface Mount, MLCC", Package / Case="0402 (1005 Metric)", Packaging=CutTape, Part Number=0402N9R0D500CT, Part Status=Active, PartId=3535, Price=0.01, Series=-, Size / Dimension="0.039\" L x 0.020\" W (1.00mm x 0.50mm)", Supplier 1=DigiKey, Thickness (Max)="0.022\" (0.55mm)"
C2 C4 C5 C6 C7 C8 C9 C14 C19 C20 C21 C22: library part 885012105001, "CAP CER 0.1UF 6.3V X5R 0402", Capacitance="0.1 µF", Device Package="0402 (1005 Metric)", Manufacturer="Würth Elektronik", Operating Temperature="-55°C ~ 85°C", Supplier Part Number 1=732-7478-1-ND, Temperature Coefficient=X5R, Tolerance=±20%, Voltage - Rated=6.3V, Applications="General Purpose", ComponentLink1Description=Datasheet, ComponentLink1URL=https://katalog.we-online.de/pbs/datasheet/885012105001.pdf, ComponentLink2Description="DigiKey Link", ComponentLink2URL=https://www.digikey.com/en/products/detail/würth-elektronik/885012105001/5453333, LastUpdated="19/9/2022 12:57:34 pm", Lifecycle Status=Active, Minimum Order=1, Mounting Type="Surface Mount, MLCC", Package / Case="0402 (1005 Metric)", Packaging=TapeAndReel, Part Number=885012105001, Part Status=Active, PartId=1931, Price=0.01, Series=WCAP-CSGP, Size / Dimension="0.039\" L x 0.020\" W (1.00mm x 0.50mm)", Supplier 1=DigiKey, Thickness (Max)="0.022\" (0.55mm)"
C10 C11 C16 C18: library part ZRB18AR61A226ME01L, "CAP CER 22UF 10V X5R 0603", Capacitance="22 µF", Device Package="0603 (1608 Metric)", Manufacturer="Murata Electronics", Operating Temperature="-55°C ~ 85°C", Supplier Part Number 1=490-ZRB18AR61A226ME01LCT-ND, Temperature Coefficient=X5R, Tolerance=±20%, Voltage - Rated=10V, Applications="Acoustic Noise Reduction", ComponentLink1Description=Datasheet, ComponentLink1URL=https://search.murata.co.jp/Ceramy/image/img/A01X/G101/ENG/ZRB18AR61A226ME01-02.pdf, ComponentLink2Description="DigiKey Link", ComponentLink2URL=https://www.digikey.com/en/products/detail/murata-electronics/ZRB18AR61A226ME01L/7243452, Features="Interposer Termination", LastUpdated="19/9/2022 1:00:06 pm", Lifecycle Status=Active, Minimum Order=1, Mounting Type="Surface Mount, MLCC", Package / Case="0603 (1608 Metric)", Packaging=TapeAndReel, Part Number=ZRB18AR61A226ME01L, Part Status=Active, PartId=34379, Price=0.07, Series=ZRB, Size / Dimension="0.063\" L x 0.031\" W (1.60mm x 0.80mm)", Supplier 1=DigiKey, Thickness (Max)="0.047\" (1.20mm)"
C15 C17: library part GRM32EC81C476KE15L, "CAP CER 47UF 16V X6S 1210", Capacitance="47 µF", Device Package="1210 (3225 Metric)", Manufacturer="Murata Electronics", Operating Temperature="-55°C ~ 105°C", Supplier Part Number 1=490-10531-1-ND, Temperature Coefficient=X6S, Tolerance=±10%, Voltage - Rated=16V, Applications="General Purpose", ComponentLink1Description=Datasheet, ComponentLink1URL=https://search.murata.co.jp/Ceramy/image/img/A01X/G101/ENG/GRM32EC81C476KE15-01.pdf, ComponentLink2Description="DigiKey Link", ComponentLink2URL=https://www.digikey.com/en/products/detail/murata-electronics/GRM32EC81C476KE15L/5027615, LastUpdated="19/9/2022 1:23:34 pm", Lifecycle Status=Active, Minimum Order=1, Mounting Type="Surface Mount, MLCC", Package / Case="1210 (3225 Metric)", Packaging=TapeAndReel, Part Number=GRM32EC81C476KE15L, Part Status=Active, PartId=23627, Price=0.13, Series=GRM, Size / Dimension="0.126\" L x 0.098\" W (3.20mm x 2.50mm)", Supplier 1=DigiKey, Thickness (Max)="0.106\" (2.70mm)"
D1 D2 D3 D4: library part B1811NB--05D000113U1930, "1.0(L)X0.5(W)X0.25(H) MM", Color=Blue, Current - Test=5mA, Device Package="0402 (1005 Metric)", Manufacturer="Harvatek Corporation", Millicandela Rating=28.5mcd, Supplier Part Number 1=3147-B1811NB--05D000113U1930CT-ND, Voltage - Forward (Vf) (Typ)=2.8V, ComponentLink1Description=Datasheet, ComponentLink1URL=https://media.digikey.com/pdf/Data%20Sheets/Harvatek%20PDFs/B1811NB--05D000113U1930.pdf, ComponentLink2Description="DigiKey Link", ComponentLink2URL=https://www.digikey.com/en/products/detail/harvatek-corporation/B1811NB-05D000113U1930/16573079, Height (Max)=0.35mm, LastUpdated="19/9/2022 1:49:16 pm", Lens Size="1.00mm x 0.50mm", Lens Style="Rectangle with Flat Top", Lens Transparency=Diffused, Lifecycle Status=Active, Minimum Order=1, Mounting Type="Surface Mount", Package / Case="0402 (1005 Metric)", Packaging=TapeAndReel, Part Number=B1811NB--05D000113U1930, Part Status=Active, PartId=1112, Price=0.09, Series=-, Size / Dimension="1.00mm L x 0.50mm W", Supplier 1=DigiKey, Viewing Angle="100°, 130°", Wavelength - Dominant=472nm, Wavelength - Peak=470nm
H1: library part WIZ850IO, "Ethernet - 10/100 Base-T/TX PHY SPI Interface Module", Package="Module WIZnet", Availability="In Stock", Check_prices=https://www.snapeda.com/parts/WIZ850IO/WIZnet/view-part/?ref=eda, MF=WIZnet, MP=WIZ850IO, Price=None, Purchase-URL=https://pricing.snapeda.com/search/part/WIZ850IO/?ref=eda, SnapEDA_Link=https://www.snapeda.com/parts/WIZ850IO/WIZnet/view-part/?ref=snap
J1: library part TYPE-C-31-M-12, "USB Connectors 24 Receptacle 1 8.94*7.3mm RoHS", Package=Package, Availability="Not in stock", Check_prices=https://www.snapeda.com/parts/TYPE-C-31-M-12/HRO+Electronics+Co.%252C+Ltd./view-part/?ref=eda, MF="HRO Electronics Co., Ltd.", MP=TYPE-C-31-M-12, Price=None, SnapEDA_Link=https://www.snapeda.com/parts/TYPE-C-31-M-12/HRO+Electronics+Co.%252C+Ltd./view-part/?ref=snap
J2: library part M40-3200545R, "No Description Available", Mfr_Name=Harwin, Copyright="Copyright (C) 2022 Ultra Librarian. All rights reserved.", Manufacturer_Part_Number=M40-3200545R, RefDes=RefDes, Type=DEV
MD1: library part CMP-05541-000002-1, "SENSOR MOTION PIR 12M RANGE BLK", Ambient Temperature Range High=+60°C, Ambient Temperature Range Low=-20°C, Manufacturer="Panasonic Electric Works", Manufacturer Part Number=EKMC1603112, Max Supply Voltage=6V, Min Supply Voltage=3V, Operating Supply Current=170uA, Package=0, Automotive=No, Category=UNK, ComponentLink2Description=Datasheet, ComponentLink2URL=https://www3.panasonic.biz/ac/ae/search_num/index.jsp?c=detail&part_no=EKMC1603112, Device Class L1=Sensors, Device Class L2="Motion Sensors", Device Class L3=unset, Digikey Description="SENSOR MOTION PIR 12M RANGE BLK", Height=20.2mm, Lead Free=Yes, Mouser Description="Board Mount Motion & Position Sensors 170uA 12m Digital Black lens", Octopart=https://octopart.com/ekmc1603112-panasonic-19688871, RoHS=TRUE, Sensor Output=TTL
MD2: library part CMP-04918-000322-1, "DC DC CONVERTER 0.6-10V", Case/Package=SMD/SMT, Max Input Voltage=17V, Max Operating Temperature=105°C, Max Output Current=8A, Min Input Voltage=4.5V, Min Operating Temperature=-40°C, Voltage - Output 1=10V, Efficiency=94%, Features=UVLO, Mount="Surface Mount", Number of Outputs=1, Packaging="Tape and Reel", RoHS Compliant=Yes
P1: library part CMP-1502-01074-1, "THT Vertical Pin Header WR-PHD, Pitch 2.54 mm, Single Row, 7 pins", Contact Resistance=20mOhm, Manufacturer="Wurth Elektronik", Operating Temperature=-40to105degC, Package Reference=61300711121, Rated Current=3A, Withstanding Voltage=500VAC, Working Voltage=250VAC, Datasheet URL=https://katalog.we-online.de/em/datasheet/6130xx11121.pdf, Gender=Male, Manufacturer URL=http://www.we-online.de, Mounting Technology=THT, Orientation=Vertical, Packaging=Bag, Part Number=61300711121, Pin Number=7, Pitch=2.54mm, Publisher=WurthElektronik, Row Number=Single
R1 R2 R3 R5 R8 R9: library part AC0402FR-7W10KL, "RES 10 KOHM 1% 1/8W 0402", Device Package="0402 (1005 Metric)", Manufacturer=Yageo, Operating Temperature="-55°C ~ 155°C", Power (Watts)="0.125W, 1/8W", Ratings=AEC-Q200, Resistance="10 kOhms", Supplier Device Package=0402, Supplier Part Number 1=13-AC0402FR-7W10KLCT-ND, Temperature Coefficient=±100ppm/°C, Tolerance=±1%, ComponentLink1Description=Datasheet, ComponentLink1URL=https://www.yageo.com/upload/media/product/productsearch/datasheet/rchip/PYu-AC_51_RoHS_L_8.pdf, ComponentLink2Description="DigiKey Link", ComponentLink2URL=https://www.digikey.com/en/products/detail/yageo/AC0402FR-7W10KL/12698852, Composition="Thick Film", Features="Automotive AEC-Q200, Moisture Resistant", Height - Seated (Max)="0.015\" (0.37mm)", LastUpdated="19/9/2022 1:13:40 pm", Lifecycle Status=Active, Minimum Order=1, Number of Terminations=2, Package / Case="0402 (1005 Metric)", Packaging=CutTape, Part Number=AC0402FR-7W10KL, Part Status=Active, PartId=66973, Price=0.01, Series=AC, Size / Dimension="0.039\" L x 0.020\" W (1.00mm x 0.50mm)", Supplier 1=DigiKey
R4: library part RP73PF1E48K7BTD, "RES 48.7K OHM 0.1% 1/10W 0402", Device Package="0402 (1005 Metric)", Manufacturer="TE Connectivity Passive Product", Operating Temperature="-55°C ~ 155°C", Power (Watts)="0.1W, 1/10W", Resistance="48.7 kOhms", Supplier Device Package=0402, Supplier Part Number 1=A127481CT-ND, Temperature Coefficient=±25ppm/°C, Tolerance=±0.1%, ComponentLink1Description=Datasheet, ComponentLink1URL=https://www.te.com/commerce/DocumentDelivery/DDEController?Action=srchrtrv&DocNm=1773272&DocType=DS&DocLang=English, ComponentLink2Description="DigiKey Link", ComponentLink2URL=https://www.digikey.com/en/products/detail/te-connectivity-passive-product/RP73PF1E48K7BTD/8261023, Composition="Thin Film", Height - Seated (Max)="0.014\" (0.35mm)", LastUpdated="19/9/2022 1:14:09 pm", Lifecycle Status=Active, Minimum Order=1, Number of Terminations=2, Package / Case="0402 (1005 Metric)", Packaging=TapeAndReel, Part Number=RP73PF1E48K7BTD, Part Status=Active, PartId=19282, Price=0.09, Series="RP73, Holsworthy", Size / Dimension="0.039\" L x 0.020\" W (1.00mm x 0.50mm)", Supplier 1=DigiKey
R6: library part RE0402BRE072KL, "CHIP RESISTOR THICK FILM PRECISI", Device Package="0402 (1005 Metric)", Manufacturer=Yageo, Operating Temperature="-55°C ~ 155°C", Power (Watts)="0.063W, 1/16W", Resistance="2 kOhms", Supplier Device Package=0402, Supplier Part Number 1=13-RE0402BRE072KLCT-ND, Temperature Coefficient=±50ppm/°C, Tolerance=±0.1%, ComponentLink1Description=Datasheet, ComponentLink1URL=https://www.yageo.com/upload/media/product/productsearch/datasheet/rchip/PYu-RE_105_RoHS_L_6.pdf, ComponentLink2Description="DigiKey Link", ComponentLink2URL=https://www.digikey.com/en/products/detail/yageo/RE0402BRE072KL/15220230, Composition="Thick Film", Height - Seated (Max)="0.015\" (0.37mm)", LastUpdated="19/9/2022 1:13:39 pm", Lifecycle Status=Active, Minimum Order=1, Number of Terminations=2, Package / Case="0402 (1005 Metric)", Packaging=TapeAndReel, Part Number=RE0402BRE072KL, Part Status=Active, PartId=67348, Price=0.05, Series=RE, Size / Dimension="0.039\" L x 0.020\" W (1.00mm x 0.50mm)", Supplier 1=DigiKey
R7: library part RP73PF1E2K21BTD, "RES 2.21K OHM 0.1% 1/10W 0402", Device Package="0402 (1005 Metric)", Manufacturer="TE Connectivity Passive Product", Operating Temperature="-55°C ~ 155°C", Power (Watts)="0.1W, 1/10W", Resistance="2.21 kOhms", Supplier Device Package=0402, Supplier Part Number 1=A127352CT-ND, Temperature Coefficient=±25ppm/°C, Tolerance=±0.1%, ComponentLink1Description=Datasheet, ComponentLink1URL=https://www.te.com/commerce/DocumentDelivery/DDEController?Action=srchrtrv&DocNm=1773272&DocType=DS&DocLang=English, ComponentLink2Description="DigiKey Link", ComponentLink2URL=https://www.digikey.com/en/products/detail/te-connectivity-passive-product/RP73PF1E2K21BTD/8260894, Composition="Thin Film", Height - Seated (Max)="0.014\" (0.35mm)", LastUpdated="19/9/2022 1:13:59 pm", Lifecycle Status=Active, Minimum Order=1, Number of Terminations=2, Package / Case="0402 (1005 Metric)", Packaging=TapeAndReel, Part Number=RP73PF1E2K21BTD, Part Status=Active, PartId=21716, Price=0.09, Series="RP73, Holsworthy", Size / Dimension="0.039\" L x 0.020\" W (1.00mm x 0.50mm)", Supplier 1=DigiKey
R10 R11 R12 R13: library part ERA-2VRW1501X, "RES 1.5K OHM 0.05% 1/10W 0402", Device Package="0402 (1005 Metric)", Manufacturer="Panasonic Electronic Components", Operating Temperature="-55°C ~ 155°C", Power (Watts)="0.1W, 1/10W", Ratings=AEC-Q200, Resistance="1.5 kOhms", Supplier Device Package=0402, Supplier Part Number 1=10-ERA-2VRW1501XCT-ND, Temperature Coefficient=±10ppm/°C, Tolerance=±0.05%, ComponentLink1Description=Datasheet, ComponentLink1URL=https://api.pim.na.industrial.panasonic.com/file_stream/main/fileversion/9152, ComponentLink2Description="DigiKey Link", ComponentLink2URL=https://www.digikey.com/en/products/detail/panasonic-electronic-components/ERA-2VRW1501X/12086957, Composition="Thin Film", Features="Anti-Sulfur, Automotive AEC-Q200", Height - Seated (Max)="0.016\" (0.40mm)", LastUpdated="19/9/2022 1:13:39 pm", Lifecycle Status=Active, Minimum Order=1, Number of Terminations=2, Package / Case="0402 (1005 Metric)", Packaging=TapeAndReel, Part Number=ERA-2VRW1501X, Part Status=Active, PartId=67400, Price=0.24, Series=ERA-2V, Size / Dimension="0.039\" L x 0.020\" W (1.00mm x 0.50mm)", Supplier 1=DigiKey
U1: library part CMP-1570-00007-1, "ARM-Based Cortex-M7 32 Bit MCU+FPU, 462 DMIPS, 1024 kB Flash, 320 kB RAM, 114 I/Os, -40 to 85 degC, 144-Pin LQFP, Halogen-Free, Tray", Clock Frequency Max="216 MHz", PartNumber=STM32F746ZG, Supply Voltage Max="3.6 V", Supply Voltage Min="1.7 V", Temperature Max="85 degC", Temperature Min="-40 degC", ComponentLink1Description="Manufacturer URL", ComponentLink1URL=http://www.st.com/web/en/home.html, ComponentLink2Description=Datasheet, ComponentLink2URL=http://www.st.com/st-web-ui/static/active/en/resource/technical/document/datasheet/DM00166116.pdf, ComponentLink3Description="Package Specification", ComponentLink3URL=http://www.st.com/st-web-ui/static/active/en/resource/technical/document/datasheet/DM00037051.pdf, Data RAM Size="320 KByte", DatasheetVersion="Rev. 1", L1 Cache Data Memory="4 KByte", L1 Cache Instruction Memory="4 KByte", Mounting Technology="Surface Mount", Number of I/Os=114, PackageDescription="144-Pin Low Profile Quad Flat Package, 20 x 20 mm Body, 0.5 mm Pitch", Packing=Tray, Program Memory Size="1024 KByte"
U2: library part CMP-13577-000002-1, "TVOC IAQ INTEGRATED SENSOR"
Y1: library part CMP-18717-000043-1, "Crystal 32MHz, 10ppm, 10pF, 50Ω", Case/Package=SMD/SMT, ESR (Equivalent Series Resistance)=60R, Frequency=32MHz, Frequency Stability=10ppm, Load Capacitance=10pF, Max Operating Temperature=70°C, Min Operating Temperature=-20°C, Package Quantity=3000, Depth=2.5mm, Frequency Tolerance=10ppm, Height=0.031inch, Length=3.2mm, Mount="Surface Mount", Number of Pins=4, Packaging="Tape and Reel", REACH SVHC="No SVHC", Series=7M, Termination=SMD/SMT, Tolerance=10ppm, Width=0.098inch
Y2: library part CMP-2000-07587-2, "CRYSTAL 32.7680KHZ 6PF SMD", Case/Package=SMD/SMT, ESR (Equivalent Series Resistance)=55kR, Frequency=32.768kHz, Frequency Tolerance=20ppm, Load Capacitance=6pF, Max Operating Temperature=85°C, Min Operating Temperature=-40°C, Operating Frequency="32.768 kHz", Package Quantity=3000, Series Resistance=60kR, Depth=1.5mm, Height=0.035inch, Lead Free="Lead Free", Length=3.2mm, Mount="Surface Mount", Number of Pins=2, Packaging="Tape and Reel", Radiation Hardening=No, REACH SVHC="No SVHC", RoHS Compliant=Yes, Series=ABS07, Termination=SMD/SMT, Tolerance=20ppm, Width=0.061inch

## Free pads (board coordinates)
  round 60 hole 118.11 unplated: 32(1110,1110) 32(1110,3200) 32(3065,1110) 32(3065,3200)

## Via types
v1: diameter 17.72, hole 7.87, Top Layer to Bottom Layer, tented both sides, 153 vias
v2: diameter 19.68, hole 7.87, Top Layer to Bottom Layer, 36 vias

## Nets (pads, with @x,y where several pads share a name; then routed paths per layer and width w, separated by ;. In a path a pad name is that pad's centre, name@x,y a point inside that pad or via, vN(x,y) a via of type N, cw(c..) or ccw(c..) an arc to the next point about the centre after c; other vN are vias at no path point)
+5: C10.1 C11.1 J1.A4/B9 J1.B4/A9 MD2.10 MD2.11-22 | length 172.5
  Top Layer w5: v1(2468.9,2671.63) MD2.10 ; v1(2526.85,3017.46) C11.1 ; v1(2528.43,2597.46) C10.1
  Top Layer w20: v1(2860.04,2655.04) J1.A4/B9@2890,2655 ; v1(2860.98,2844.02) J1.B4/A9
  other v1: 2475,2615 2475,2650 2475,2750 2475,2790 2474.73,2821.55
  other v2: 2519.09,2715.98 2519.09,2755.35 2519.09,2794.72 2503.35,2840 2534.84,2840 2519.09,2885.28 2519.09,2924.65 2519.09,2964.02
ETH_CLK: H1.4 U1.133 | length 1478.9
  Top Layer w5: v1(2167.93,1802.93) 2169.07,1801.79 2186.79,1801.79 2210.55,1825.55 2240.19,1825.55 U1.133
  Bottom Layer w5: H1.4 1169.64,2749.18 1221.69,2749.18 v1(2167.93,1802.93)
ETH_CS: H1.5 U1.136 | length 1510.4
  Top Layer w5: U1.136 v1(2274.64,1767.99)
  Bottom Layer w5: H1.5 1301.58,2652.01 2146.54,1807.05 2146.54,1801.18 2178.73,1769 2273.63,1769 v1(2274.64,1767.99)
ETH_INT: H1.6 U1.137 | length 1411.2
  Top Layer w5: v1(2202.26,1748.31) U1.137
  Bottom Layer w5: H1.6 1388.85,2552.01 2137.54,1803.32 2137.54,1797.46 2175,1760 2190.57,1760 v1(2202.26,1748.31)
ETH_RST: H1.11 U1.139 | length 1153.2
  Top Layer w5: U1.139 2246.08,1713.33 2269.05,1713.33 2279.69,1723.96 2279.69,1733.22 v1(2282.12,1735.65)
  Bottom Layer w5: H1.11 2020,2598.82 2020,2020 2189.94,1850.06 2261.56,1850.06 2291,1820.62 2291,1747.97 2282.12,1739.1 v1(2282.12,1735.65)
ETH_RX: H1.12 U1.134 | length 951.1
  Top Layer w5: U1.134 v1(2274.64,1807.36)
  Bottom Layer w5: H1.12 1966.81,2043.19 2175,1835 2253.49,1835 2264.55,1823.94 2264.55,1820.4 2274.64,1810.31 v1(2274.64,1807.36)
ETH_TX: H1.3 U1.135 | length 1532.7
  Top Layer w5: v1(2202.26,1787.68) U1.135
  Bottom Layer w5: H1.3 1250,2768.82 1250,2744 2184.29,1809.71 2184.29,1805.65 v1(2202.26,1787.68)
GND: C1.2 C2.2 C3.2 C4.1 C5.1 C6.1 C7.1 C8.1 C9.1 C10.2 C11.2 C13.2 C14.1 C15.1 C16.1 C17.1 C18.1 C19.1 C20.1 C21.1 C22.1 D1.2 D2.2 D3.2 D4.2 H1.1 H1.2 H1.7 J1.321 J1.A1/B12 J1.B1/A12 J1.S2 J1.S3 J1.S4 J2.10 MD1.1 MD2.3 MD2.9 MD2.12-13-14-15-18-19-20-21 MD2.23 P1.1 R1.2 R2.2 R4.1 R6.1 R7.1 U1.16 U1.31 U1.38 U1.51 U1.61 U1.83 U1.94 U1.107 U1.120 U1.130 U2.6 U2.7 U2.9 Y1.2 Y1.4
  other v1: 1200,1200 1600,1200 2000,1200 2200,1200 2400,1200 2800,1200 3000,1200 1300,1400 1500,1400 2100,1400 2300,1400 3100,1400 1200,1600 1400,1600 1600,1600 2000,1600 2800,1600 3000,1600 1300,1800 1700,1800 1900,1800 2500,1800 2700,1800 2900,1800 1200,2000 1400,2000 1600,2000 1800,2000 2200,2000 2400,2000 2600,2000 2800,2000 3000,2000 1300,2200 1500,2200 1700,2200 1900,2200 2100,2200 2500,2200 2700,2200 2900,2200 1200,2400 1400,2400 1800,2400 2000,2400 2200,2400 1300,2600 1500,2600 1700,2600 1900,2600 2100,2600 2300,2600 1400,2800 1600,2800 1800,2800 2000,2800 2800,2800 3000,2800 1300,3000 1500,3000 1700,3000 1900,3000 2900,3000 3100,3000 1200,3200 1400,3200 1600,3200 1800,3200 2000,3200 2200,3200
  other v2: 2623.42,2706.14 2659.25,2706.14 2587.99,2715.98 2623.42,2733.7 2659.25,2733.7 2587.99,2755.35 2623.42,2761.26 2659.25,2761.26 2623.42,2788.82 2659.25,2788.82 2587.99,2794.72 2572.24,2840 2603.74,2840 2587.99,2885.28 2623.42,2891.18 2659.25,2891.18 2623.42,2918.74 2659.25,2918.74 2587.99,2924.65 2623.42,2946.3 2659.25,2946.3 2587.99,2964.02 2623.42,2973.86 2659.25,2973.86
I2C_SCL: R8.2 U1.11 U2.1 | length 718
  Top Layer w5: R8.2 2475,1061.87 2485,1071.87 v1(2485,1075) 2498.45,1088.45 2498.45,1103.13 U2.1 ; U1.11 v1(2512.36,1576.12)
  Bottom Layer w5: v1(2485,1075) 2501.36,1058.64 2526.78,1058.64 2536.36,1068.22 2536.36,1106.87 2515,1128.22 2515,1217.27 2545,1247.27 2545,1450 2512.36,1482.64 v1(2512.36,1576.12)
I2C_SDA: R9.2 U1.10 U2.2 | length 569.5
  Top Layer w5: v1(2492.68,1497.26) U1.10 ; U2.2 2519.41,1103.23 2519.41,1075.59 v1(2520,1075) 2537.08,1057.92 R9.2
  Bottom Layer w5: v1(2492.68,1497.26) 2492.68,1472.32 2536,1429 2536,1253.73 2506,1223.73 2506,1120.93 2520,1106.93 v1(2520,1075)
IAQ_INT: U1.12 U2.3 | length 454.3
  Top Layer w5: v1(2531.36,1135) 2531.36,1131.56 2538.5,1124.41 U2.3 ; v1(2532.05,1497.26) U1.12
  Bottom Layer w5: v1(2531.36,1135) 2554,1157.64 2554,1475.31 v1(2532.05,1497.26)
IAQ_RST: U1.13 U2.11 | length 591.7
  Top Layer w5: v1(2435,1155) U2.11 ; U1.13 v1(2551.73,1576.12)
  Bottom Layer w5: v1(2435,1155) 2461.29,1181.29 2461.29,1548.19 2505.59,1592.48 2519.14,1592.48 2535.37,1576.25 2551.61,1576.25 v1(2551.73,1576.12)
LCD_BLK: P1.7 U1.99 | length 1119.6
  Top Layer w5: v1(2492.68,2333.88) U1.99
  Bottom Layer w5: v1(2492.68,2333.88) 2529.77,2370.97 2529.77,2449.77 2770,2690 2770,3050 2916,3196 2916,3226 P1.7
LCD_DC: P1.6 U1.98 | length 991.2
  Top Layer w5: U1.98 v1(2512.36,2412.74)
  Bottom Layer w5: v1(2512.36,2412.74) 2512.36,2449.63 2761,2698.27 2761,3171 P1.6
LCD_RST: P1.5 U1.97 | length 1118.8
  Top Layer w5: v1(2532.05,2333.88) U1.97
  Bottom Layer w5: v1(2532.05,2333.88) 2531.93,2333.75 2515.69,2333.75 2499.45,2317.52 2482.48,2317.52 2476.32,2323.68 2476.32,2340.65 2489.35,2353.68 2489.35,2439.35 2725,2675 P1.5
LCD_SCK: P1.3 U1.111 | length 1308.3
  Top Layer w5: U1.111 2316.75,2260.12 2326.63,2270 v1(2330,2270)
  Bottom Layer w5: v1(2330,2270) 2330,2384.35 2430.65,2485 2506.62,2485 2676.59,2654.98 2676.59,3083.41 P1.3
LCD_SDA: P1.4 U1.113 | length 1346
  Top Layer w5: U1.113 2332.31,2220.75 2345,2233.44 v1(2345,2236.72)
  Bottom Layer w5: v1(2345,2236.72) 2346.36,2238.07 2346.36,2387.98 2433.38,2475 2509.34,2475 2716,2681.66 2716,3074 2625,3165 P1.4
NetC1_1: C1.1 U1.24 Y1.1 | length 237.7
  Top Layer w5: U1.24 2768.27,1486.53 2774,1480.8 2774,1412.93 2795.12,1391.81 Y1.1 2868.11,1391.81 C1.1
NetC3_1: C3.1 U1.23 Y1.3 | length 307
  Top Layer w5: C3.1 2711.93,1323.89 Y1.3 2714.88,1324.88 2736,1346 2736,1349.94 2755,1368.94 2755,1470 2748.58,1476.42 U1.23
NetC12_1: C12.1 U1.8 Y2.1 | length 249
  Top Layer w5: C12.1 2412.54,1373.25 Y2.1 2405.79,1395.75 2453.31,1443.27 U1.8
NetC13_1: C13.1 U1.9 Y2.2 | length 241.2
  Top Layer w5: U1.9 2472.99,1442.01 2495,1420 2495,1389.21 Y2.2 2500.35,1376.14 C13.1
NetD1_1: D1.1 R10.1 | length 55
  Top Layer w5: D1.1 R10.1
NetD2_1: D2.1 R11.1 | length 55
  Top Layer w5: D2.1 R11.1
NetD3_1: D3.1 R12.1 | length 55
  Top Layer w5: D3.1 R12.1
NetD4_1: D4.1 R13.1 | length 55
  Top Layer w5: D4.1 R13.1
NetMD2_2: MD2.2 R5.1 R7.2 | length 138.6
  Top Layer w5: R5.1 2264.72,2907.64 R7.2 2323.66,2903.98 MD2.2
NetMD2_5: MD2.5 R6.2 | length 88.9
  Top Layer w5: R6.2 2324.83,2813.86 2343.86,2813.86 2357.2,2827.2 MD2.5
NetMD2_24: MD2.24 R4.2 | length 85.8
  Top Layer w5: R4.2 2417.36,3012.6 2443.31,2986.65 MD2.24
NetR1_1: R1.1 U1.34 | length 74.7
  Top Layer w6: U1.34 2965.12,1499.29 2989.41,1475 R1.1
NetR2_1: R2.1 U1.138 | length 74.6
  Top Layer w6: R2.1 2169.02,1728.62 U1.138
NetR10_2: R10.2 U1.127 | length 1379.5
  Top Layer w5: R10.2 1257.64,1055 v1(1285,1055) ; v1(2047.87,1857.13) 2048.59,1857.13 2059.8,1868.33 2063.33,1868.33 2140.16,1945.16 U1.127
  Bottom Layer w5: v1(1285,1055) 1285,1094.25 v1(2047.87,1857.13)
NetR11_2: R11.2 U1.128 | length 1294.5
  Top Layer w5: R11.2 1397.64,1055 v1(1425,1055) ; v1(2063.94,1841.06) 2066.06,1841.06 2150.47,1925.47 U1.128
  Bottom Layer w5: v1(1425,1055) 1425,1202.13 v1(2063.94,1841.06)
NetR12_2: R12.2 U1.129 | length 1211.6
  Top Layer w5: R12.2 1532.64,1055 v1(1560,1055) ; v1(2080,1825) 2160.79,1905.79 U1.129
  Bottom Layer w5: v1(1560,1055) 1560,1305 v1(2080,1825)
NetR13_2: R13.2 U1.132 | length 1106.2
  Top Layer w5: R13.2 1682.64,1055 v1(1710,1055) ; v1(2096.06,1808.94) 2133.86,1846.73 U1.132
  Bottom Layer w5: v1(1710,1055) 1710,1422.87 v1(2096.06,1808.94)
PGOOD: MD2.7 U1.140 | length 1299.2
  Top Layer w5: U1.140 v1(2281.12,1689.25)
  Top Layer w6: v1(2355,2790) 2365.63,2779.37 2391.73,2779.37 MD2.7